# Altium PCB PCB1.PcbDoc (part 1 of 2)
Units mm, origin at the board's own origin, x right, y up, seen from the top; angles counter-clockwise.
Board outline 75.27 x 55.69 mm, 4 copper layers (Top Layer, Layer 1, Layer 2, Bottom Layer), stack 0.365 mm thick; 201 components, 124 nets, 644 pads, 413 vias.
Unrouted connection lines stored in the file: 108.
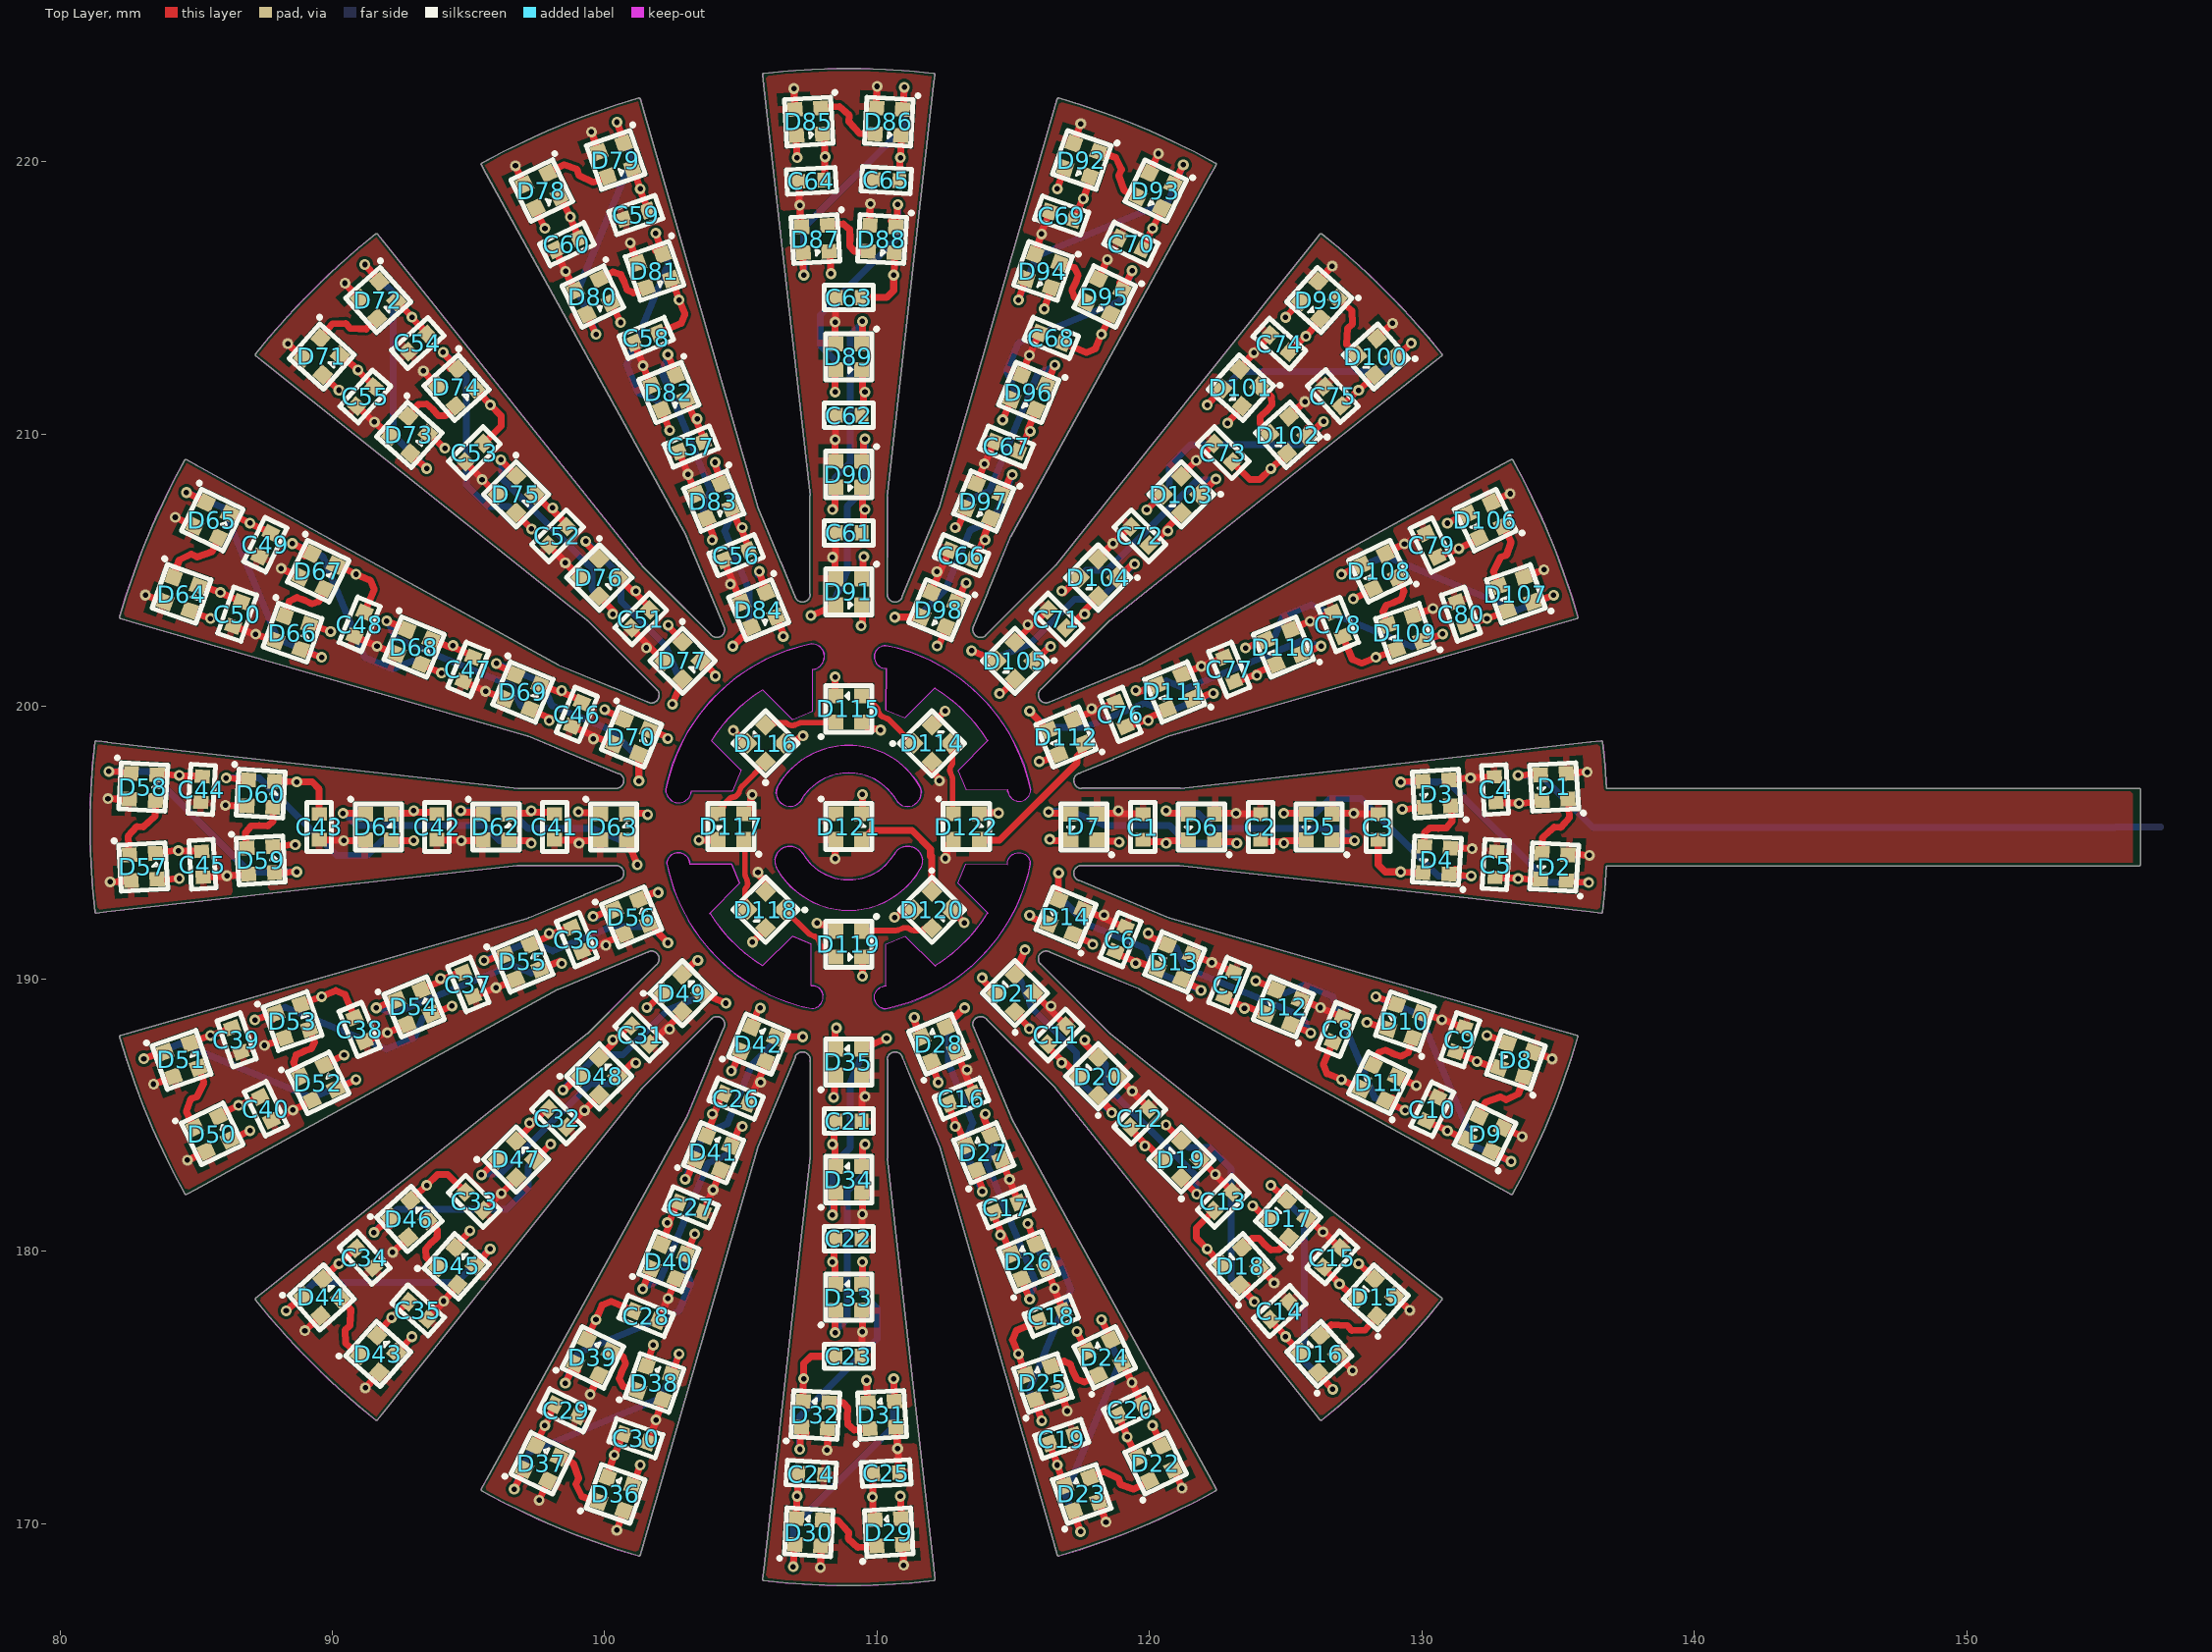
[diagram p0: Top Layer view]
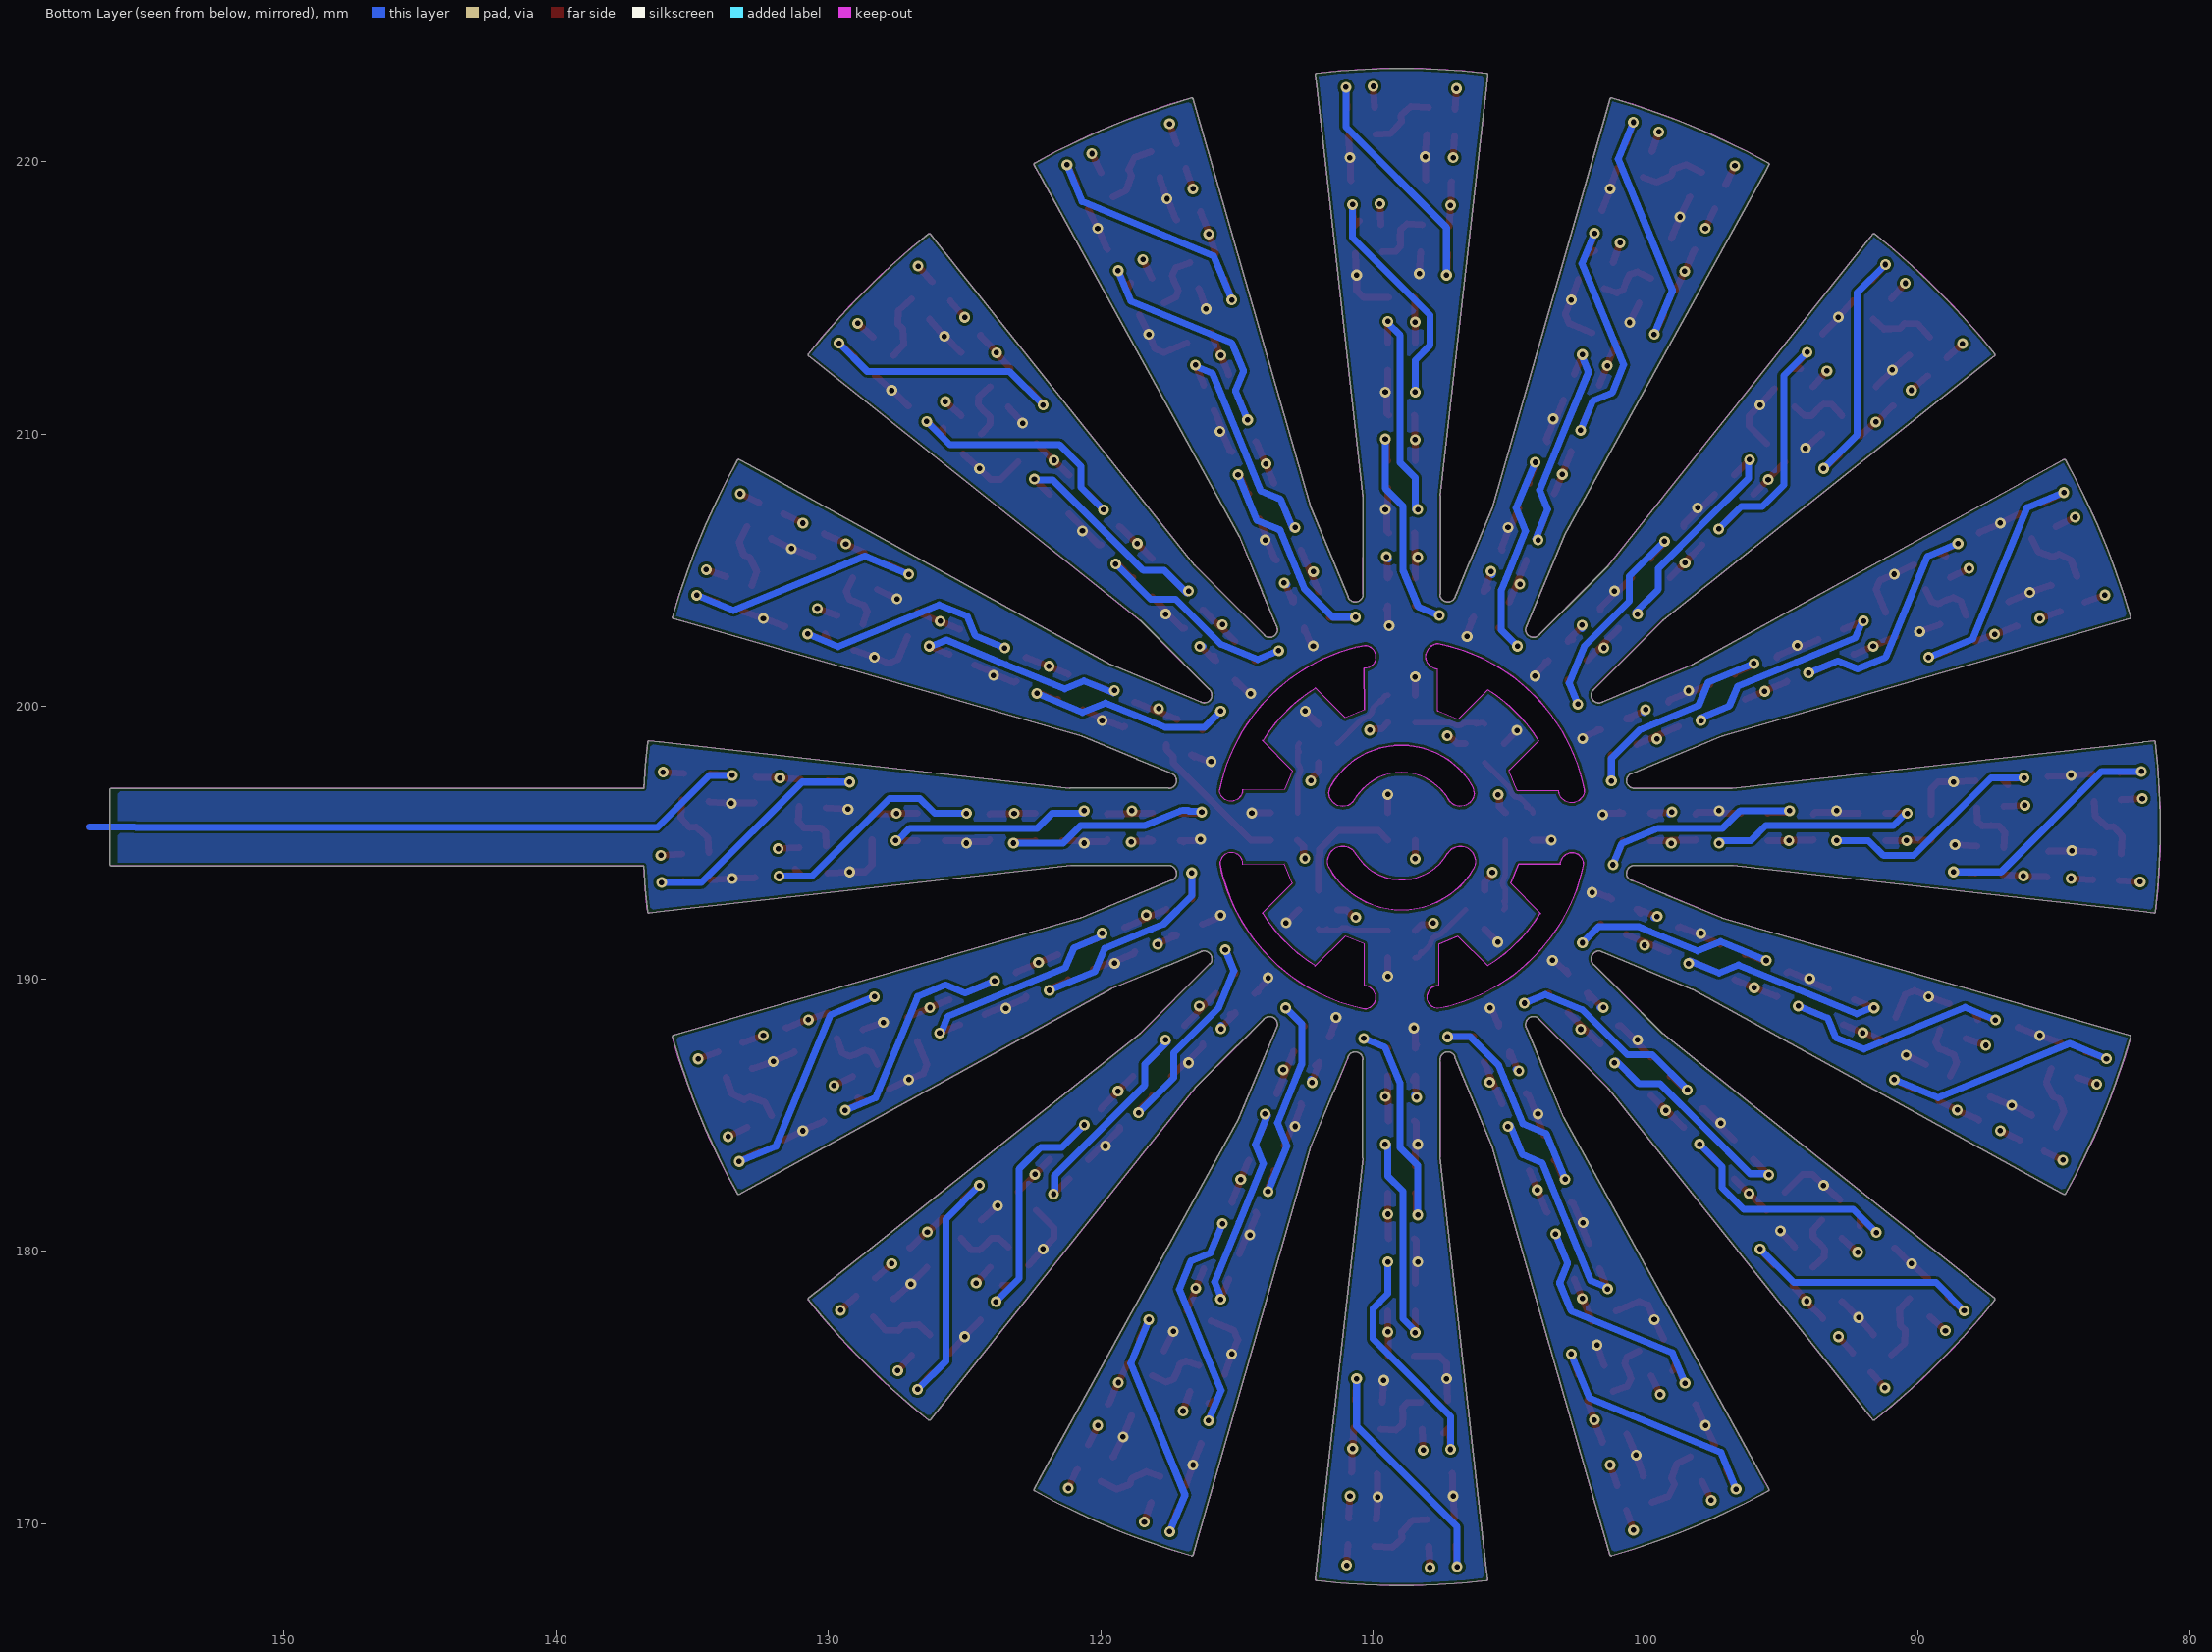
[diagram p1: Bottom Layer view, seen from below]
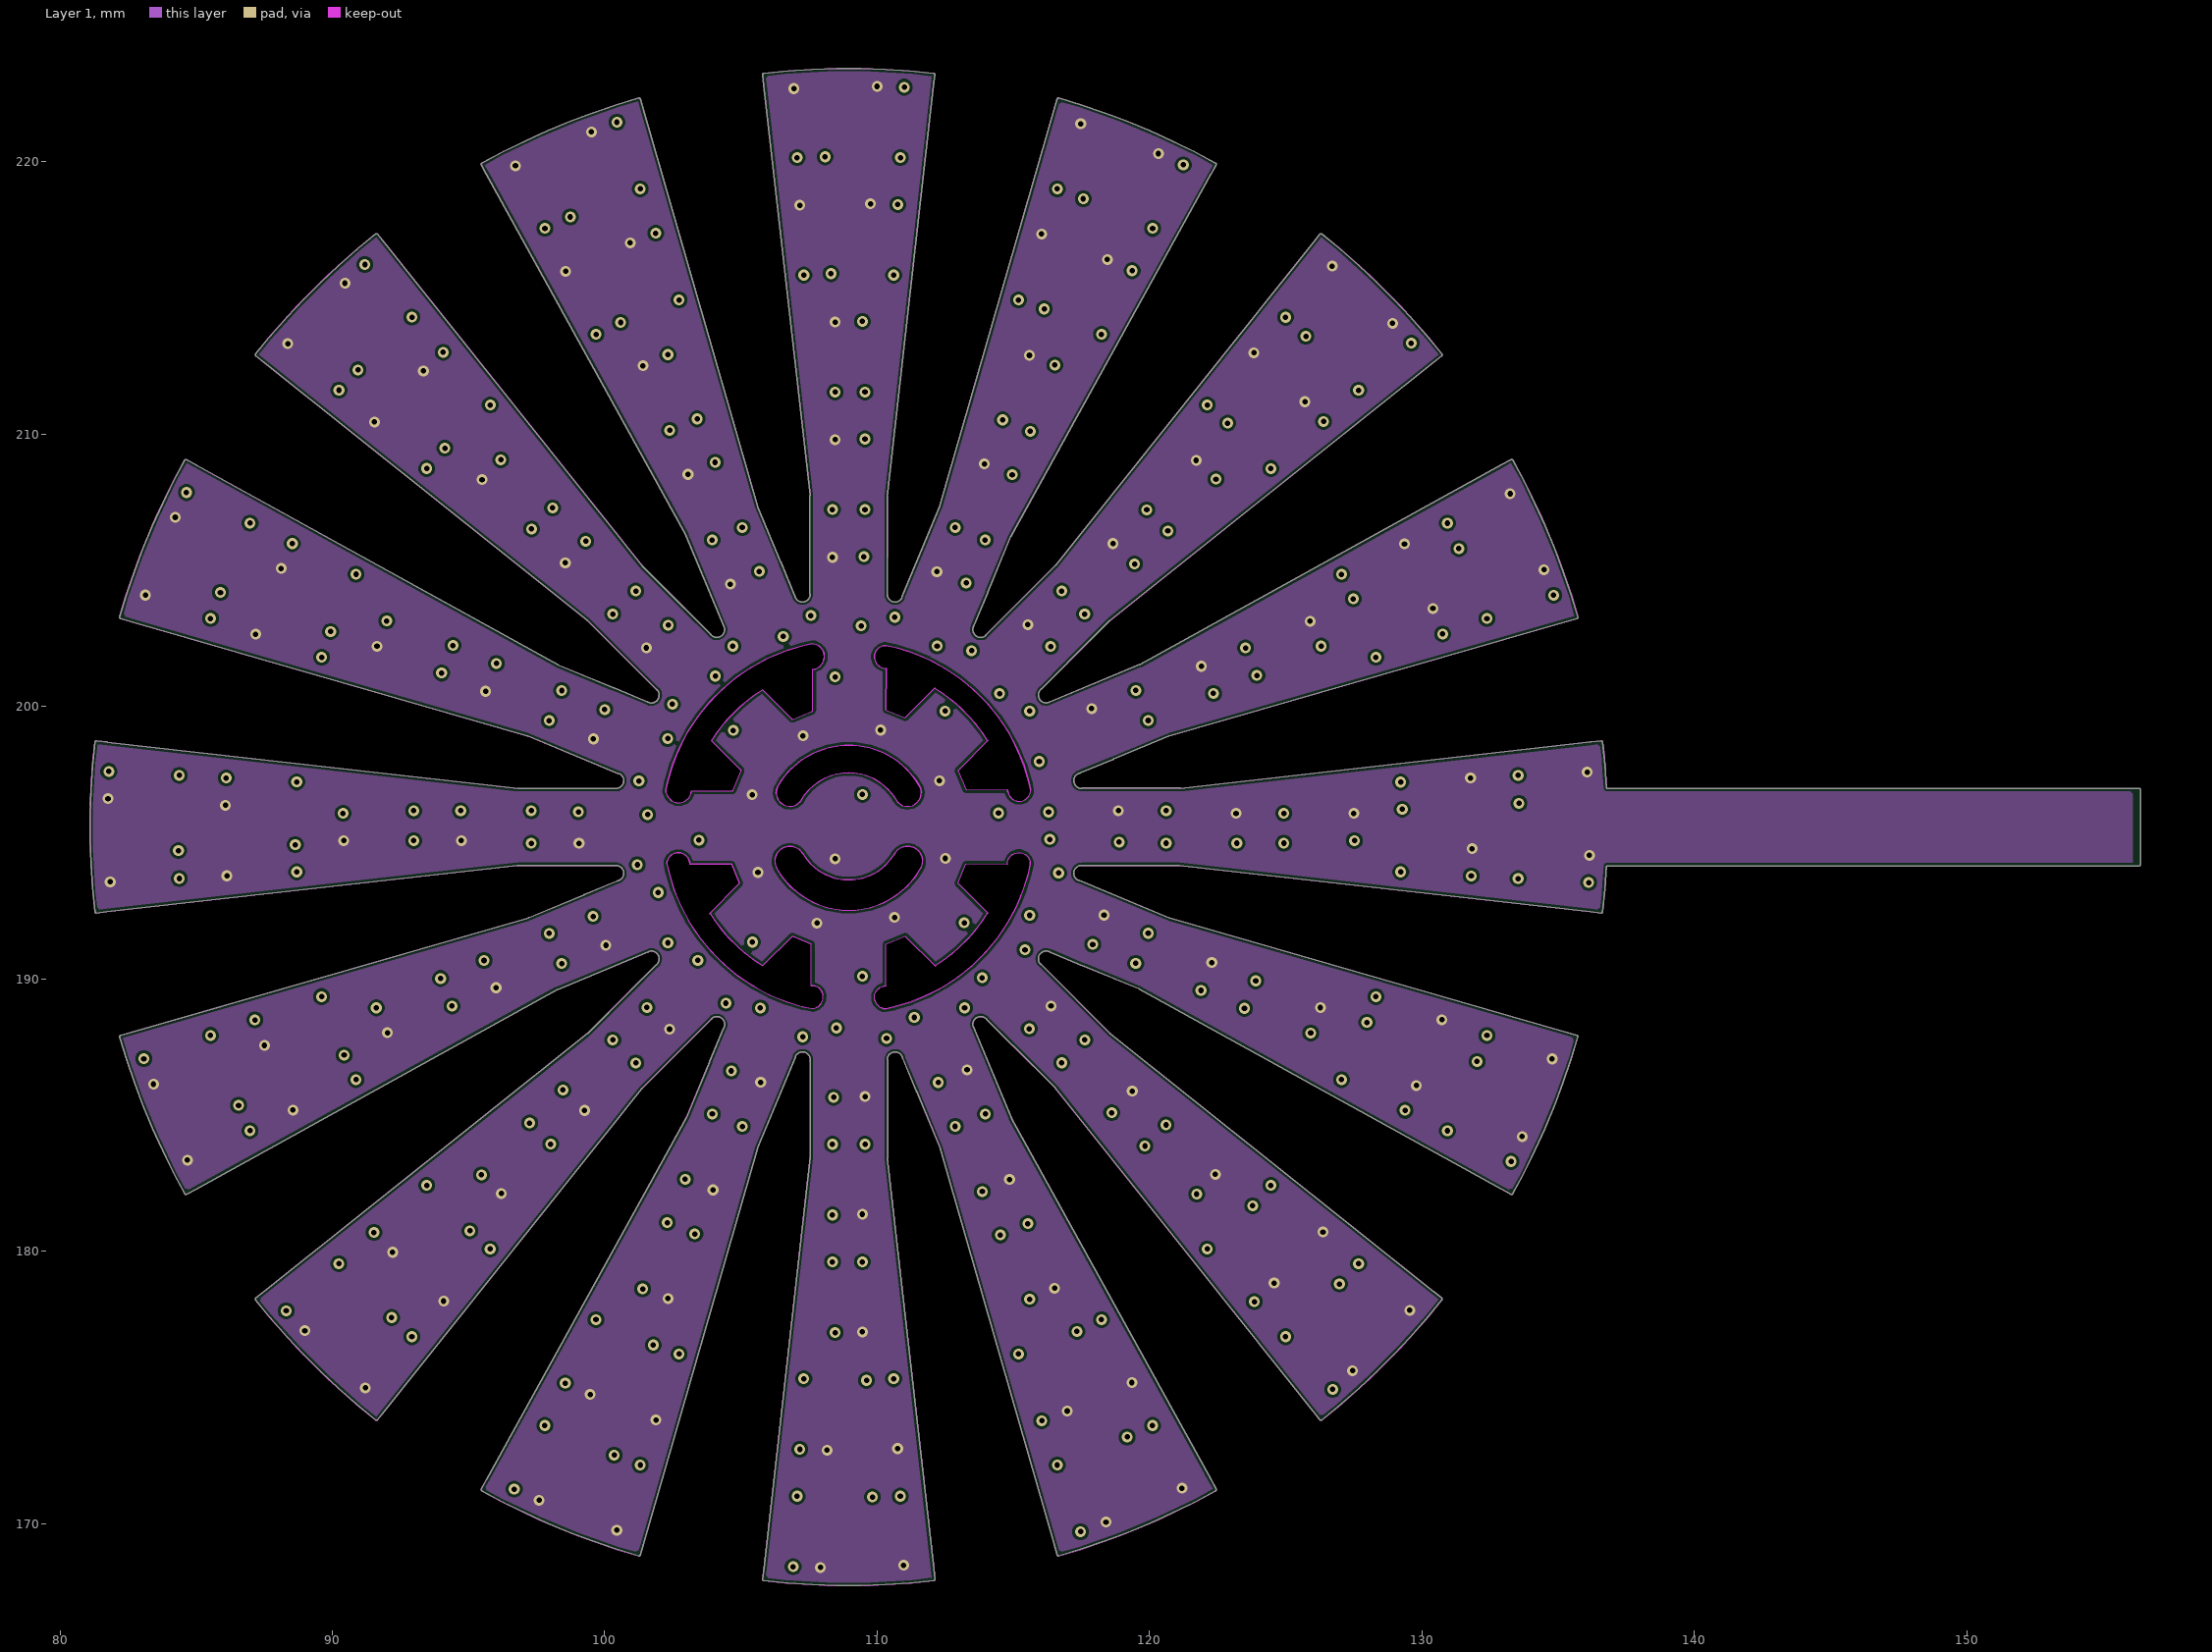
[diagram p2: Layer 1]
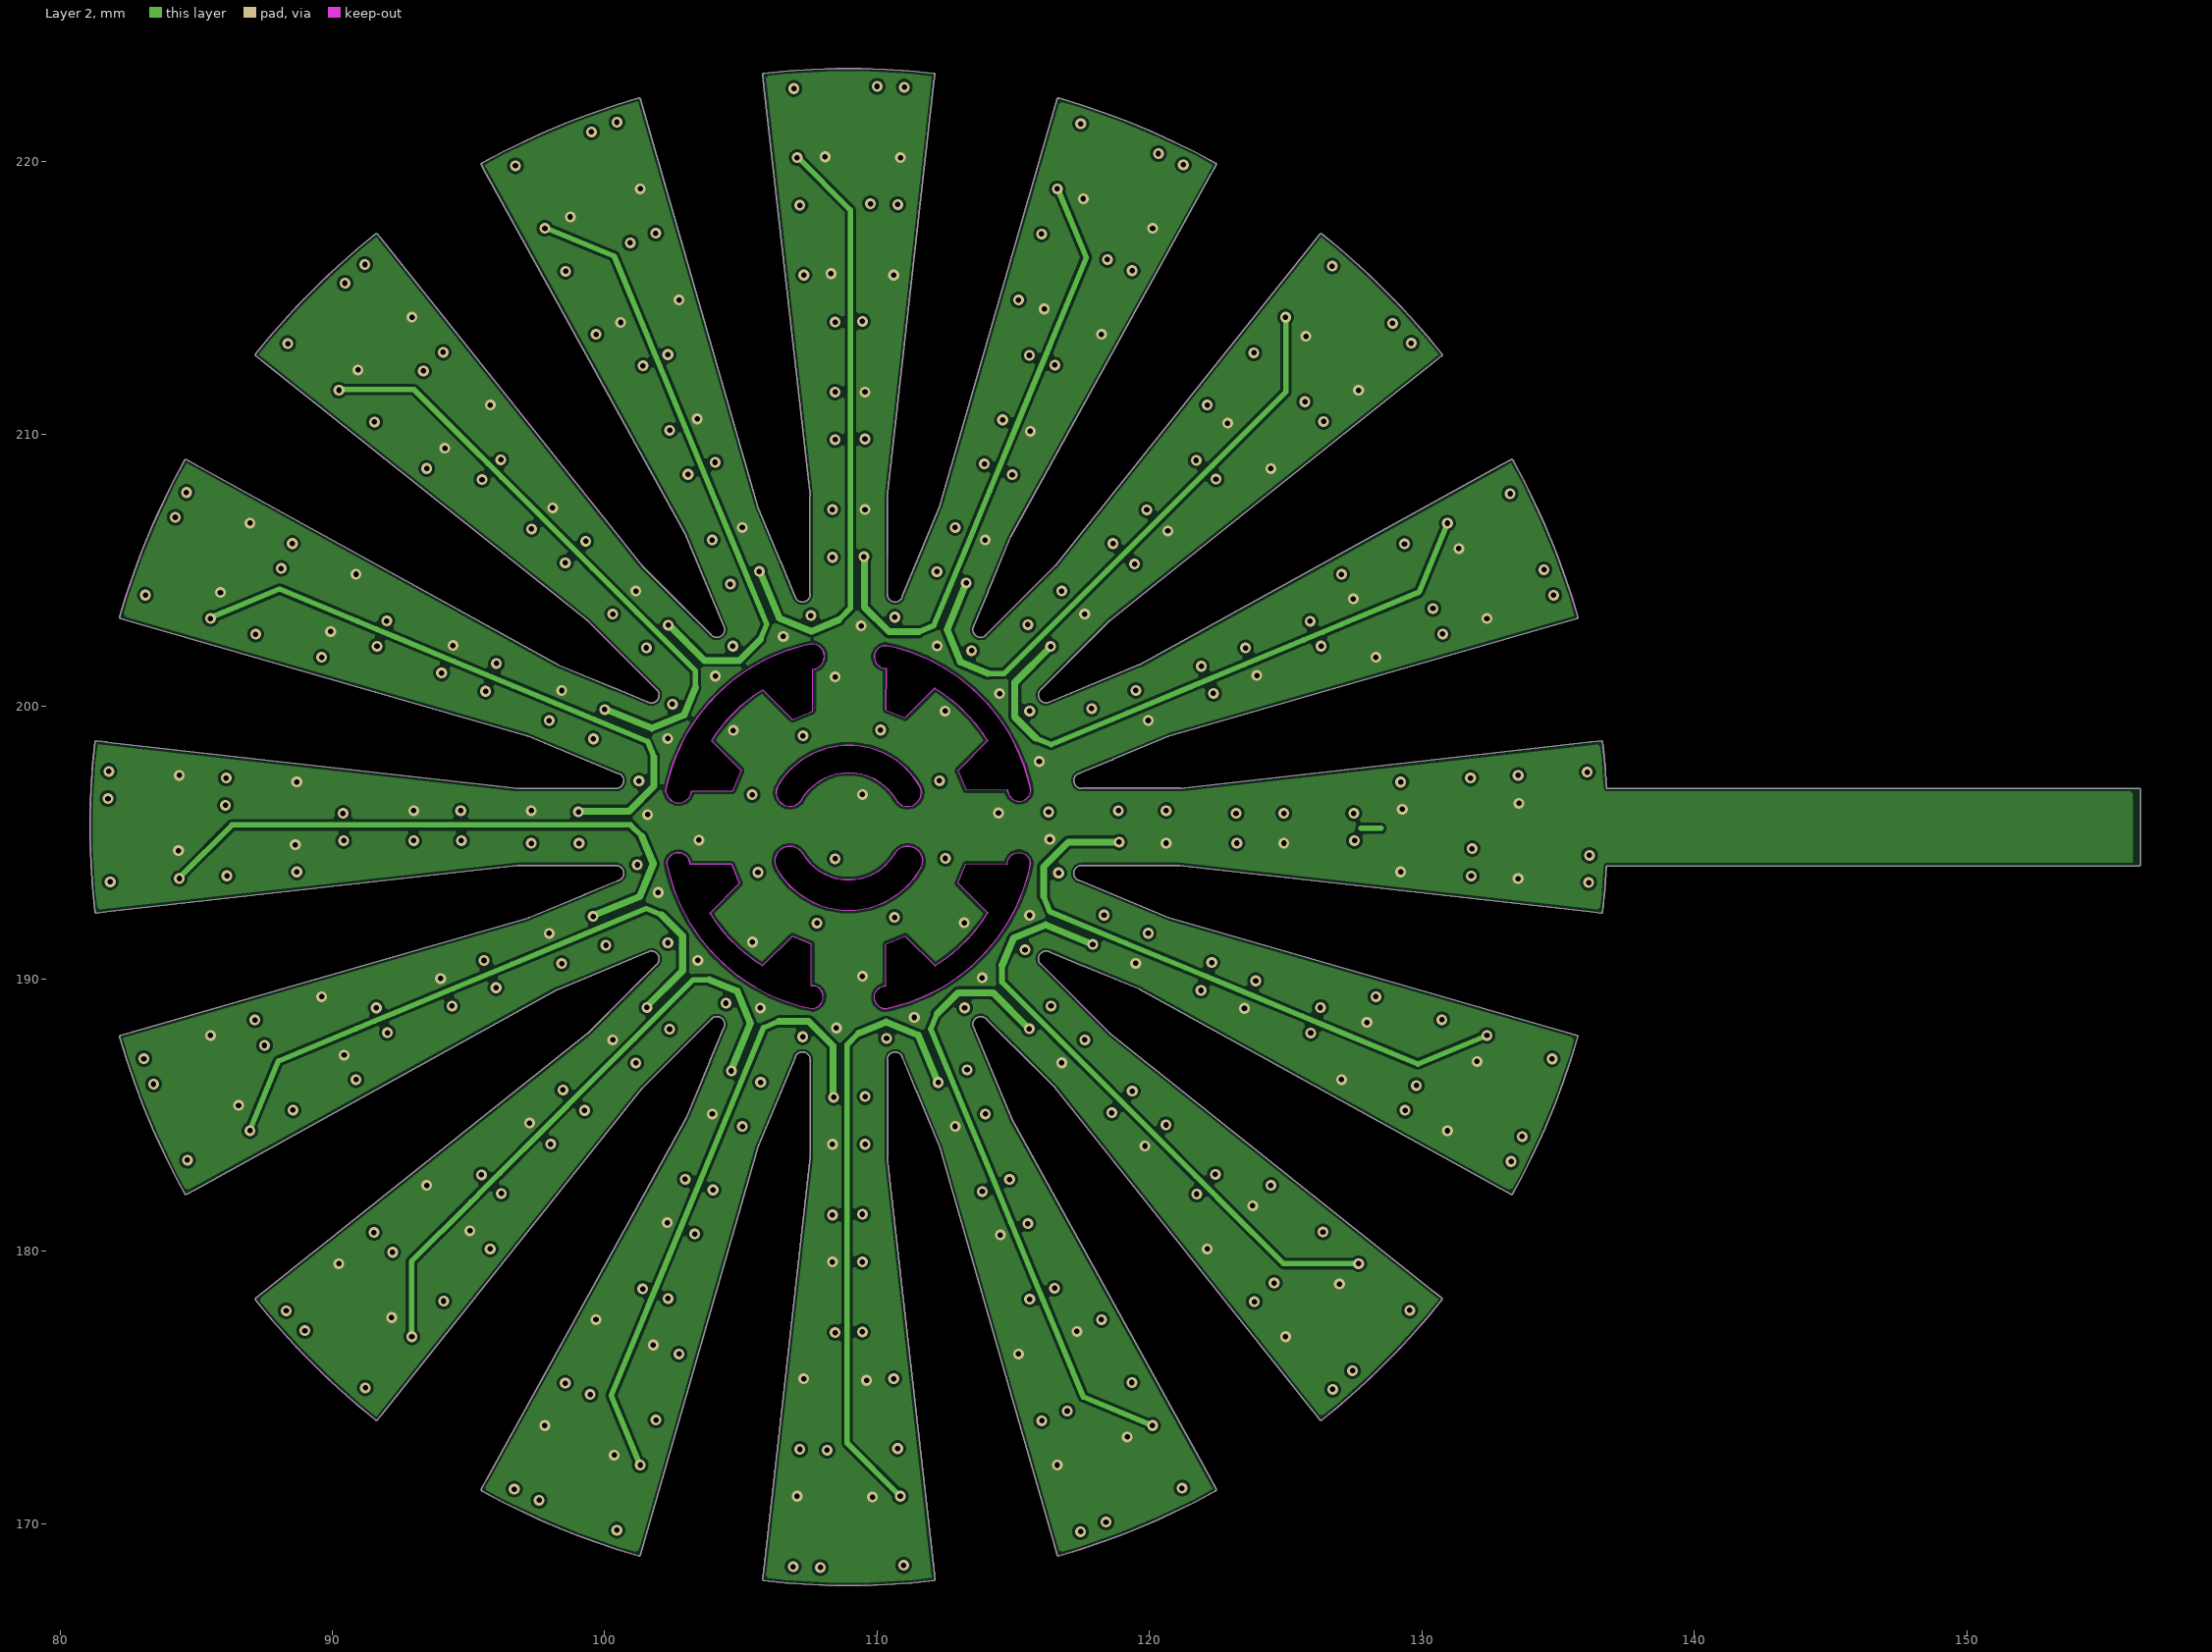
[diagram p3: Layer 2]

## Layer stack, top to bottom
Top Solder: solder mask 0.0102, Solder Resist, Dk 3.5
Top Layer: signal copper 0.0356
Dielectric 1: prepreg 0.0711, PP-006, Dk 4.1
Layer 1: signal copper 0.035
Dielectric2: dielectric 0.082, FR-4, Dk 4.8
Layer 2: signal copper 0.035
Dielectric 2: prepreg 0.0711, PP-006, Dk 4.1
Bottom Layer: signal copper 0.0356
Bottom Solder: solder mask 0.0102, Solder Resist, Dk 3.5

## Board outline
393 vertices, not listed, extent 81.109,167.733 156.375,223.427
cut-out: 110.311,188.902 cw(c110.325,189.323) 110.325,189.745 110.325,189.73 110.326,191.286 111.024,191.575 112.132,190.465 112.121,190.483 ccw(c108.957,195.58) 114.054,192.415 114.061,192.411 112.961,193.512 113.25,194.21 114.779,194.209 114.779,194.231 cw(c115.2,194.217) 115.621,194.217 cw(c108.957,195.566)
cut-out: 110.326,199.873 111.024,199.584 112.125,200.684 112.121,200.677 cw(c108.956,195.58) 114.054,198.745 114.071,198.755 112.961,197.647 113.25,196.95 114.806,196.948 114.792,196.948 ccw(c115.213,196.948) 115.634,196.934 ccw(c108.97,195.58) 110.319,202.245 ccw(c110.319,201.823) 110.305,201.402 110.327,201.402
cut-out: 110.693,196.573 ccw(c111.116,196.841) 111.522,197.132 111.547,197.093 ccw(c108.957,195.58) 106.371,197.101 ccw(c106.798,196.841) 107.234,196.597 107.221,196.575 cw(c108.956,195.58)
cut-out: 111.586,194.033 ccw(c111.115,194.319) 111.115,194.87 ccw(c111.115,194.319) 110.635,194.588 ccw(c110.646,194.582) 110.635,194.588 ccw(c110.386,194.736) 110.635,194.589 110.635,194.588 cw(c108.957,195.58) 107.264,194.613 ccw(c107.22,194.588) 107.258,194.62 ccw(c106.797,194.319) 106.797,194.87 ccw(c106.797,194.319) 106.331,194.028 ccw(c108.957,195.58)
cut-out: 102.241,196.943 ccw(c102.713,196.943) 103.183,196.9 104.663,196.899 ccw(c104.663,196.95) 104.709,196.93 104.998,197.628 ccw(c104.952,197.647) 105.002,197.647 ccw(c104.952,197.647) 104.987,197.683 103.922,198.75 cw(c108.956,195.58) 105.788,200.616 106.853,199.549 ccw(c106.889,199.584) 106.908,199.538 107.605,199.827 ccw(c107.586,199.873) 107.637,199.873 107.638,201.368 ccw(c107.588,201.837) 108.059,201.837 ccw(c107.588,201.837) 107.604,202.308 107.592,202.307 ccw(c108.956,195.594) 102.242,196.953 ccw(c102.291,196.943)
cut-out: 105.791,190.482 cw(c108.956,195.58) 103.859,192.415 103.841,192.404 104.952,193.512 104.662,194.21 103.106,194.211 103.121,194.211 ccw(c102.699,194.211) 102.278,194.226 ccw(c108.942,195.58) 107.593,188.915 ccw(c107.593,189.336) 107.607,189.757 107.585,189.757 107.586,191.286 106.889,191.575

## Design rules (kind name [scope] priority, off if disabled: settings)
Clearance [All] p1: gap=0.1 ignorepadtopadclearanceinfootprint=FALSE
PasteMaskExpansion [All] p1: expansion=-0.1
PolygonConnect [IsVia] p1: connectstyle=Direct reliefconductorwidth=0.254 reliefentries=4 polygonreliefangle="90 Angle" airgapwidth=0.254
PolygonConnect PolygonConnect_1 [All] p2: connectstyle=Relief reliefconductorwidth=0.254 reliefentries=4 polygonreliefangle="90 Angle" airgapwidth=0.254
RoutingVias [All] p1: holewidth=0.711 width=1.27 viastyle="Through Hole" minholewidth=0.1 minwidth=0.4 maxholewidth=0.711 maxwidth=1.27
SolderMaskExpansion [All] p1: expansion=0 istentingtop=FALSE
Width [All] p1: maxlimit=0.254 minlimit=0.15 preferedwidth=0.254
29 further rules are at their usual default settings.

## Components (designator, comment, footprint, x,y, rotation, side; value= is the part's Value field where it differs from the comment)
C1 "100nF" RESC1005X03N 119.756,195.579 r90 top
C2 "100nF" RESC1005X03N 124.074,195.579 r90 top
C3 "100nF" RESC1005X03N 128.392,195.579 r90 top
C4 "100nF" RESC1005X03N 132.683,196.95 r93.25 top
C5 "100nF" RESC1005X03N 132.71,194.201 r86.75 top
C6 "100nF" RESC1005X03N 118.933,191.446 r67.5 top
C7 "100nF" RESC1005X03N 122.923,189.794 r67.5 top
C8 "100nF" RESC1005X03N 126.912,188.141 r67.5 top
C9 "100nF" RESC1005X03N 131.401,187.766 r70.75 top
C10 "100nF" RESC1005X03N 130.374,185.216 r64.25 top
C11 "100nF" RESC1005X03N 116.592,187.943 r45 top
C12 "100nF" RESC1005X03N 119.645,184.89 r45 top
C13 "100nF" RESC1005X03N 122.698,181.836 r45 top
C14 "100nF" RESC1005X03N 124.778,177.808 r41.75 top
C15 "100nF" RESC1005X03N 126.703,179.772 r48.25 top
C16 "100nF" RESC1005X03N 113.088,185.602 r22.5 top
C17 "100nF" RESC1005X03N 114.741,181.613 r22.5 top
C18 "100nF" RESC1005X03N 116.393,177.623 r22.5 top
C19 "100nF" RESC1005X03N 116.772,173.107 r19.25 top
C20 "100nF" RESC1005X03N 119.302,174.184 r25.75 top
C21 "100nF" RESC1005X03N 108.955,184.78 r0 top
C22 "100nF" RESC1005X03N 108.955,180.462 r0 top
C23 "100nF" RESC1005X03N 108.955,176.144 r0 top
C24 "100nF" RESC1005X03N 107.577,171.826 r356.75 top
C25 "100nF" RESC1005X03N 110.327,171.853 r3.25 top
C26 "100nF" RESC1005X03N 104.823,185.603 r337.5 top
C27 "100nF" RESC1005X03N 103.17,181.613 r337.5 top
C28 "100nF" RESC1005X03N 101.518,177.624 r337.5 top
C29 "100nF" RESC1005X03N 98.592,174.162 r334.25 top
C30 "100nF" RESC1005X03N 101.143,173.135 r340.75 top
C31 "100nF" RESC1005X03N 101.319,187.944 r315 top
C32 "100nF" RESC1005X03N 98.266,184.891 r315 top
C33 "100nF" RESC1005X03N 95.213,181.837 r315 top
C34 "100nF" RESC1005X03N 91.185,179.758 r311.75 top
C35 "100nF" RESC1005X03N 93.148,177.833 r318.25 top
C36 "100nF" RESC1005X03N 98.979,191.448 r292.5 top
C37 "100nF" RESC1005X03N 94.989,189.795 r292.5 top
C38 "100nF" RESC1005X03N 91,188.143 r292.5 top
C39 "100nF" RESC1005X03N 86.483,187.764 r289.25 top
C40 "100nF" RESC1005X03N 87.56,185.234 r295.75 top
C41 "100nF" RESC1005X03N 98.157,195.581 r270 top
C42 "100nF" RESC1005X03N 93.839,195.581 r270 top
C43 "100nF" RESC1005X03N 89.521,195.581 r270 top
C44 "100nF" RESC1005X03N 85.203,196.959 r266.75 top
C45 "100nF" RESC1005X03N 85.229,194.209 r273.25 top
C46 "100nF" RESC1005X03N 98.979,199.713 r247.5 top
C47 "100nF" RESC1005X03N 94.99,201.366 r247.5 top
C48 "100nF" RESC1005X03N 91.001,203.018 r247.5 top
C49 "100nF" RESC1005X03N 87.538,205.944 r244.25 top
C50 "100nF" RESC1005X03N 86.511,203.393 r250.75 top
C51 "100nF" RESC1005X03N 101.32,203.217 r225 top
C52 "100nF" RESC1005X03N 98.267,206.27 r225 top
C53 "100nF" RESC1005X03N 95.214,209.323 r225 top
C54 "100nF" RESC1005X03N 93.135,213.351 r221.75 top
C55 "100nF" RESC1005X03N 91.21,211.388 r228.25 top
C56 "100nF" RESC1005X03N 104.824,205.557 r202.5 top
C57 "100nF" RESC1005X03N 103.172,209.547 r202.5 top
C58 "100nF" RESC1005X03N 101.519,213.536 r202.5 top
C59 "100nF" RESC1005X03N 101.14,218.053 r199.25 top
C60 "100nF" RESC1005X03N 98.61,216.976 r205.75 top
C61 "100nF" RESC1005X03N 108.957,206.379 r180 top
C62 "100nF" RESC1005X03N 108.957,210.697 r180 top
C63 "100nF" RESC1005X03N 108.957,215.015 r180 top
C64 "100nF" RESC1005X03N 107.586,219.306 r183.25 top
C65 "100nF" RESC1005X03N 110.335,219.333 r176.75 top
C66 "100nF" RESC1005X03N 113.09,205.557 r157.5 top
C67 "100nF" RESC1005X03N 114.742,209.546 r157.5 top
C68 "100nF" RESC1005X03N 116.395,213.535 r157.5 top
C69 "100nF" RESC1005X03N 116.77,218.025 r160.75 top
C70 "100nF" RESC1005X03N 119.32,216.998 r154.25 top
C71 "100nF" RESC1005X03N 116.593,203.215 r135 top
C72 "100nF" RESC1005X03N 119.646,206.269 r135 top
C73 "100nF" RESC1005X03N 122.7,209.322 r135 top
C74 "100nF" RESC1005X03N 124.764,213.326 r138.25 top
C75 "100nF" RESC1005X03N 126.728,211.401 r131.75 top
C76 "100nF" RESC1005X03N 118.934,199.712 r112.5 top
C77 "100nF" RESC1005X03N 122.923,201.364 r112.5 top
C78 "100nF" RESC1005X03N 126.912,203.017 r112.5 top
C79 "100nF" RESC1005X03N 130.352,205.926 r115.75 top
C80 "100nF" RESC1005X03N 131.429,203.396 r109.25 top
D1 "WS2812B-2020" CAF-100P200X220-4N 134.852,197.048 r3.25 top
D2 "WS2812B-2020" CAF-100P200X220-4N 134.852,194.11 r356.75 top
D3 "WS2812B-2020" CAF-100P200X220-4N 130.541,196.803 r3.25 top
D4 "WS2812B-2020" CAF-100P200X220-4N 130.541,194.355 r356.75 top
D5 "WS2812B-2020" CAF-100P200X220-4N 126.223,195.579 r0 top
D6 "WS2812B-2020" CAF-100P200X220-4N 121.905,195.579 r0 top
D7 "WS2812B-2020" CAF-100P200X220-4N 117.587,195.579 r0 top
D8 "WS2812B-2020" CAF-100P200X220-4N 133.443,187.026 r340.75 top
D9 "WS2812B-2020" CAF-100P200X220-4N 132.319,184.312 r334.25 top
D10 "WS2812B-2020" CAF-100P200X220-4N 129.367,188.45 r340.75 top
D11 "WS2812B-2020" CAF-100P200X220-4N 128.43,186.188 r334.25 top
D12 "WS2812B-2020" CAF-100P200X220-4N 124.909,188.971 r337.5 top
D13 "WS2812B-2020" CAF-100P200X220-4N 120.92,190.624 r337.5 top
D14 "WS2812B-2020" CAF-100P200X220-4N 116.93,192.276 r337.5 top
D15 "WS2812B-2020" CAF-100P200X220-4N 128.306,178.307 r318.25 top
D16 "WS2812B-2020" CAF-100P200X220-4N 126.229,176.229 r311.75 top
D17 "WS2812B-2020" CAF-100P200X220-4N 125.084,181.182 r318.25 top
D18 "WS2812B-2020" CAF-100P200X220-4N 123.353,179.451 r311.75 top
D19 "WS2812B-2020" CAF-100P200X220-4N 121.166,183.37 r315 top
D20 "WS2812B-2020" CAF-100P200X220-4N 118.112,186.423 r315 top
D21 "WS2812B-2020" CAF-100P200X220-4N 115.059,189.476 r315 top
D22 "WS2812B-2020" CAF-100P200X220-4N 120.223,172.217 r295.75 top
D23 "WS2812B-2020" CAF-100P200X220-4N 117.509,171.092 r289.25 top
D24 "WS2812B-2020" CAF-100P200X220-4N 118.347,176.106 r295.75 top
D25 "WS2812B-2020" CAF-100P200X220-4N 116.085,175.169 r289.25 top
D26 "WS2812B-2020" CAF-100P200X220-4N 115.564,179.627 r292.5 top
D27 "WS2812B-2020" CAF-100P200X220-4N 113.911,183.616 r292.5 top
D28 "WS2812B-2020" CAF-100P200X220-4N 112.259,187.605 r292.5 top
D29 "WS2812B-2020" CAF-100P200X220-4N 110.425,169.684 r273.25 top
D30 "WS2812B-2020" CAF-100P200X220-4N 107.487,169.684 r266.75 top
D31 "WS2812B-2020" CAF-100P200X220-4N 110.18,173.995 r273.25 top
D32 "WS2812B-2020" CAF-100P200X220-4N 107.732,173.995 r266.75 top
D33 "WS2812B-2020" CAF-100P200X220-4N 108.956,178.313 r270 top
D34 "WS2812B-2020" CAF-100P200X220-4N 108.955,182.631 r270 top
D35 "WS2812B-2020" CAF-100P200X220-4N 108.956,186.949 r270 top
D36 "WS2812B-2020" CAF-100P200X220-4N 100.403,171.093 r250.75 top
D37 "WS2812B-2020" CAF-100P200X220-4N 97.689,172.217 r244.25 top
D38 "WS2812B-2020" CAF-100P200X220-4N 101.826,175.169 r250.75 top
D39 "WS2812B-2020" CAF-100P200X220-4N 99.565,176.106 r244.25 top
D40 "WS2812B-2020" CAF-100P200X220-4N 102.348,179.627 r247.5 top
D41 "WS2812B-2020" CAF-100P200X220-4N 103.995,183.618 r247.5 top
D42 "WS2812B-2020" CAF-100P200X220-4N 105.647,187.607 r247.5 top
D43 "WS2812B-2020" CAF-100P200X220-4N 91.683,176.23 r228.25 top
D44 "WS2812B-2020" CAF-100P200X220-4N 89.606,178.307 r221.75 top
D45 "WS2812B-2020" CAF-100P200X220-4N 94.558,179.452 r228.25 top
D46 "WS2812B-2020" CAF-100P200X220-4N 92.827,181.183 r221.75 top
D47 "WS2812B-2020" CAF-100P200X220-4N 96.746,183.37 r225 top
D48 "WS2812B-2020" CAF-100P200X220-4N 99.794,186.425 r225 top
D49 "WS2812B-2020" CAF-100P200X220-4N 102.847,189.478 r225 top
D50 "WS2812B-2020" CAF-100P200X220-4N 85.593,184.313 r205.75 top
D51 "WS2812B-2020" CAF-100P200X220-4N 84.469,187.027 r199.25 top
D52 "WS2812B-2020" CAF-100P200X220-4N 89.482,186.189 r205.75 top
D53 "WS2812B-2020" CAF-100P200X220-4N 88.545,188.451 r199.25 top
D54 "WS2812B-2020" CAF-100P200X220-4N 93.003,188.972 r202.5 top
D55 "WS2812B-2020" CAF-100P200X220-4N 96.993,190.625 r202.5 top
D56 "WS2812B-2020" CAF-100P200X220-4N 100.982,192.277 r202.5 top
D57 "WS2812B-2020" CAF-100P200X220-4N 83.06,194.111 r183.25 top
D58 "WS2812B-2020" CAF-100P200X220-4N 83.06,197.049 r176.75 top
D59 "WS2812B-2020" CAF-100P200X220-4N 87.371,194.356 r183.25 top
D60 "WS2812B-2020" CAF-100P200X220-4N 87.371,196.804 r176.75 top
D61 "WS2812B-2020" CAF-100P200X220-4N 91.689,195.58 r180 top
D62 "WS2812B-2020" CAF-100P200X220-4N 96.007,195.58 r180 top
D63 "WS2812B-2020" CAF-100P200X220-4N 100.325,195.58 r180 top
D64 "WS2812B-2020" CAF-100P200X220-4N 84.469,204.133 r160.75 top
D65 "WS2812B-2020" CAF-100P200X220-4N 85.593,206.847 r154.25 top
D66 "WS2812B-2020" CAF-100P200X220-4N 88.546,202.71 r160.75 top
D67 "WS2812B-2020" CAF-100P200X220-4N 89.483,204.971 r154.25 top
D68 "WS2812B-2020" CAF-100P200X220-4N 93.004,202.188 r157.5 top
D69 "WS2812B-2020" CAF-100P200X220-4N 96.993,200.536 r157.5 top
D70 "WS2812B-2020" CAF-100P200X220-4N 100.982,198.883 r157.5 top
D71 "WS2812B-2020" CAF-100P200X220-4N 89.607,212.853 r138.25 top
D72 "WS2812B-2020" CAF-100P200X220-4N 91.684,214.93 r131.75 top
D73 "WS2812B-2020" CAF-100P200X220-4N 92.828,209.978 r138.25 top
D74 "WS2812B-2020" CAF-100P200X220-4N 94.559,211.709 r131.75 top
D75 "WS2812B-2020" CAF-100P200X220-4N 96.747,207.79 r135 top
D76 "WS2812B-2020" CAF-100P200X220-4N 99.8,204.737 r135 top
D77 "WS2812B-2020" CAF-100P200X220-4N 102.853,201.683 r135 top
D78 "WS2812B-2020" CAF-100P200X220-4N 97.69,218.943 r115.75 top
D79 "WS2812B-2020" CAF-100P200X220-4N 100.404,220.067 r109.25 top
D80 "WS2812B-2020" CAF-100P200X220-4N 99.566,215.054 r115.75 top
D81 "WS2812B-2020" CAF-100P200X220-4N 101.827,215.99 r109.25 top
D82 "WS2812B-2020" CAF-100P200X220-4N 102.349,211.533 r112.5 top
D83 "WS2812B-2020" CAF-100P200X220-4N 104.001,207.543 r112.5 top
D84 "WS2812B-2020" CAF-100P200X220-4N 105.654,203.554 r112.5 top
D85 "WS2812B-2020" CAF-100P200X220-4N 107.488,221.476 r93.25 top
D86 "WS2812B-2020" CAF-100P200X220-4N 110.425,221.476 r86.75 top
D87 "WS2812B-2020" CAF-100P200X220-4N 107.733,217.165 r93.25 top
D88 "WS2812B-2020" CAF-100P200X220-4N 110.181,217.165 r86.75 top
D89 "WS2812B-2020" CAF-100P200X220-4N 108.957,212.847 r90 top
D90 "WS2812B-2020" CAF-100P200X220-4N 108.957,208.529 r90 top
D91 "WS2812B-2020" CAF-100P200X220-4N 108.957,204.211 r90 top
D92 "WS2812B-2020" CAF-100P200X220-4N 117.51,220.067 r70.75 top
D93 "WS2812B-2020" CAF-100P200X220-4N 120.224,218.943 r64.25 top
D94 "WS2812B-2020" CAF-100P200X220-4N 116.086,215.99 r70.75 top
D95 "WS2812B-2020" CAF-100P200X220-4N 118.348,215.053 r64.25 top
D96 "WS2812B-2020" CAF-100P200X220-4N 115.565,211.532 r67.5 top
D97 "WS2812B-2020" CAF-100P200X220-4N 113.912,207.543 r67.5 top
D98 "WS2812B-2020" CAF-100P200X220-4N 112.26,203.554 r67.5 top
D99 "WS2812B-2020" CAF-100P200X220-4N 126.229,214.929 r48.25 top
D100 "WS2812B-2020" CAF-100P200X220-4N 128.307,212.852 r41.75 top
D101 "WS2812B-2020" CAF-100P200X220-4N 123.354,211.708 r48.25 top
D102 "WS2812B-2020" CAF-100P200X220-4N 125.085,209.977 r41.75 top
D103 "WS2812B-2020" CAF-100P200X220-4N 121.166,207.789 r45 top
D104 "WS2812B-2020" CAF-100P200X220-4N 118.113,204.736 r45 top
D105 "WS2812B-2020" CAF-100P200X220-4N 115.06,201.683 r45 top
D106 "WS2812B-2020" CAF-100P200X220-4N 132.319,206.846 r25.75 top
D107 "WS2812B-2020" CAF-100P200X220-4N 133.443,204.132 r19.25 top
D108 "WS2812B-2020" CAF-100P200X220-4N 128.43,204.97 r25.75 top
D109 "WS2812B-2020" CAF-100P200X220-4N 129.367,202.709 r19.25 top
D110 "WS2812B-2020" CAF-100P200X220-4N 124.909,202.187 r22.5 top
D111 "WS2812B-2020" CAF-100P200X220-4N 120.92,200.535 r22.5 top
D112 "WS2812B-2020" CAF-100P200X220-4N 116.931,198.882 r22.5 top
D114 "WS2812B-2020" CAF-100P200X220-4N 112.01,198.647 r225 top
D115 "WS2812B-2020" CAF-100P200X220-4N 108.956,199.912 r270 top
D116 "WS2812B-2020" CAF-100P200X220-4N 105.903,198.647 r315 top
D117 "WS2812B-2020" CAF-100P200X220-4N 104.638,195.594 r0 top
D118 "WS2812B-2020" CAF-100P200X220-4N 105.903,192.541 r45 top
D119 "WS2812B-2020" CAF-100P200X220-4N 108.956,191.276 r90 top
D120 "WS2812B-2020" CAF-100P200X220-4N 112.01,192.541 r135 top
D121 "WS2812B-2020" CAF-100P200X220-4N 108.956,195.594 r180 top
D122 "WS2812B-2020" CAF-100P200X220-4N 113.274,195.594 r180 top (schematic designator D117)

## Footprints (in the part's own frame and the unit in brackets; to place one, negate y for a bottom-side part, rotate by r counter-clockwise, add the part's x,y. Pads: shape width x height; smd on the part's side, far side on the other; paste and mask are expansions set on the pad)
CAF-100P200X220-4N [mm] "Chip Array, Flat, 4-Leads, Pitch 1.00mm,  Body 2.00x2.20mm,  IPC Medium Density"
  rect 0.55x0.55 smd mask+0: 1(0.475,-0.475) 2(0.475,0.475) 3(-0.475,0.475) 4(-0.475,-0.475)
  silkscreen extent -0.85,-1.02 1.02,0.85, body extent -0.75,-0.75 0.75,0.75, height 0.65
RESC1005X03N [mm] "Chip Resistor, 2-Leads, Body 1.00x0.50mm, IPC Medium Density"
  rect 0.5x0.55 smd: 1(-0.475,0) 2(0.475,0)
  silkscreen extent -0.9,-0.45 0.9,0.45, body extent -0.5,-0.25 0.5,0.25, height 0.3

## Part data
C1 C2 C3 C4 C5 C6 C7 C8 C9 C10 C11 C12 C13 C14 C15 C16 C17 C18 C19 C20 C21 C22 C23 C24 C25 C26 C27 C28 C29 C30 C31 C32 C33 C34 C35 C36 C37 C38 C39 C40 C41 C42 C43 C44 C45 C46 C47 C48 C49 C50 C51 C52 C53 C54 C55 C56 C57 C58 C59 C60 C61 C62 C63 C64 C65 C66 C67 C68 C69 C70 C71 C72 C73 C74 C75 C76 C77 C78 C79 C80: library part CAP

## Via types
v1: diameter 0.4, hole 0.2, Top Layer to Bottom Layer, tented both sides, 413 vias

## Nets (pads, with @x,y where several pads share a name; then routed paths per layer and width w, separated by ;. In a path a pad name is that pad's centre, name@x,y a point inside that pad or via, vN(x,y) a via of type N, cw(c..) or ccw(c..) an arc to the next point about the centre after c; other vN are vias at no path point)
GND: C1.2 C2.2 C3.2 C4.2 C5.2 C6.2 C7.2 C8.2 C9.2 C10.2 C11.2 C12.2 C13.2 C14.2 C15.2 C16.2 C17.2 C18.2 C19.2 C20.2 C21.2 C22.2 C23.2 C24.2 C25.2 C26.2 C27.2 C28.2 C29.2 C30.2 C31.2 C32.2 C33.2 C34.2 C35.2 C36.2 C37.2 C38.2 C39.2 C40.2 C41.2 C42.2 C43.2 C44.2 C45.2 C46.2 C47.2 C48.2 C49.2 C50.2 C51.2 C52.2 C53.2 C54.2 C55.2 C56.2 C57.2 C58.2 C59.2 C60.2 C61.2 C62.2 C63.2 C64.2 C65.2 C66.2 C67.2 C68.2 C69.2 C70.2 C71.2 C72.2 C73.2 C74.2 C75.2 C76.2 C77.2 C78.2 C79.2 C80.2 D1.2 D2.2 D3.2 D4.2 D5.2 D6.2 D7.2 D8.2 D9.2 D10.2 D11.2 D12.2 D13.2 D14.2 D15.2 D16.2 D17.2 D18.2 D19.2 D20.2 D21.2 D22.2 D23.2 D24.2 D25.2 D26.2 D27.2 D28.2 D29.2 D30.2 D31.2 D32.2 D33.2 D34.2 D35.2 D36.2 D37.2 D38.2 D39.2 D40.2 D41.2 D42.2 D43.2 D44.2 D45.2 D46.2 D47.2 D48.2 D49.2 D50.2 D51.2 D52.2 D53.2 D54.2 D55.2 D56.2 D57.2 D58.2 D59.2 D60.2 D61.2 D62.2 D63.2 D64.2 D65.2 D66.2 D67.2 D68.2 D69.2 D70.2 D71.2 D72.2 D73.2 D74.2 D75.2 D76.2 D77.2 D78.2 D79.2 D80.2 D81.2 D82.2 D83.2 D84.2 D85.2 D86.2 D87.2 D88.2 D89.2 D90.2 D91.2 D92.2 D93.2 D94.2 D95.2 D96.2 D97.2 D98.2 D99.2 D100.2 D101.2 D102.2 D103.2 D104.2 D105.2 D106.2 D107.2 D108.2 D109.2 D110.2 D111.2 D112.2 D114.2 D115.2 D116.2 D117.2 D118.2 D119.2 D120.2 D121.2 D122.2 | length 152.9
  Top Layer w0.254: v1(81.764,196.622) D58.2@82.533,196.579 ; v1(81.846,193.566) D57.2@82.614,193.609 ; v1(83.139,204.094) D64.2@83.866,203.84 ; v1(83.435,186.137) D51.2@84.162,186.391 ; v1(84.233,206.949) D65.2@84.926,206.614 ; v1(84.68,183.344) D50.2@85.374,183.679 ; C45.2@85.256,193.735 85.282,193.761 86.108,193.761 v1(86.132,193.785) D59.2@86.9,193.829 ; v1(86.075,196.377) D60.2@86.844,196.334 ; C50.2@86.355,202.945 86.388,202.959 87.151,202.643 v1(87.183,202.657) D66.2@87.909,202.403 ; v1(87.512,187.56) D53.2@88.238,187.814 ; C40.2@87.766,184.806 87.78,184.84 88.543,185.156 v1(88.556,185.188) D52.2@89.249,185.522 ; v1(88.122,205.073) D67.2@88.815,204.738 ; v1(88.362,213.326) D71.2@88.936,212.815 ; v1(88.991,177.089) D44.2@89.566,177.602 ; C43.2@89.521,195.106 89.533,195.093 90.407,195.093 v1(90.419,195.081) D61.2@91.189,195.081 ; v1(90.466,215.545) D72.2@90.978,214.97 ; C48.2@90.819,202.579 90.826,202.563 91.633,202.229 v1(91.639,202.212) D68.2@92.351,201.918 ; C55.2@90.894,211.034 90.93,211.034 91.514,210.45 v1(91.548,210.45) D73.2@92.122,209.938 ; C38.2@91.182,187.704 91.198,187.697 92.005,188.032 v1(92.022,188.025) D54.2@92.733,188.319 ; v1(91.21,174.986) D43.2@91.721,175.559 ; v1(92.213,179.964) D46.2@92.787,180.477 ; v1(93.341,212.323) D74.2@93.853,211.749 ; C35.2@93.502,177.517 93.502,177.554 94.086,178.137 v1(94.086,178.172) D45.2@94.598,178.746 ; C42.2@93.839,195.106 93.851,195.093 94.725,195.093 v1(94.737,195.081) D62.2@95.507,195.081 ; C47.2@94.808,200.927 94.815,200.911 95.622,200.576 v1(95.629,200.56) D69.2@96.34,200.265 ; C53.2@94.878,208.987 94.878,208.97 95.496,208.352 v1(95.496,208.334) D75.2@96.04,207.79 ; C37.2@95.171,189.357 95.187,189.35 95.994,189.684 v1(96.011,189.677) D55.2@96.722,189.972 ; C33.2@95.549,181.502 95.566,181.502 96.184,182.119 v1(96.202,182.119) D47.2@96.746,182.664 ; v1(96.721,219.856) D78.2@97.055,219.162 ; v1(97.587,170.856) D37.2@97.922,171.55 ; C52.2@97.931,205.934 97.931,205.916 98.549,205.299 v1(98.549,205.281) D76.2@99.093,204.737 ; C41.2@98.157,195.106 98.169,195.093 99.043,195.093 v1@99.055,195.081 ; C60.2@98.183,216.769 98.216,216.756 98.532,215.993 v1(98.564,215.98) D80.2@98.898,215.287 ; C32.2@98.602,184.555 98.62,184.555 99.237,185.173 v1(99.255,185.173) D48.2@99.799,185.717 ; C46.2@98.797,199.274 98.804,199.258 99.611,198.924 v1@99.618,198.907 ; v1(99.055,194.979) 99.076,195.03 v1@99.055,195.081 ; C36.2@99.16,191.009 99.177,191.002 99.984,191.337 v1@100,191.33 ; v1(99.463,174.746) D39.2@99.798,175.439 ; v1(99.513,221.101) D79.2@99.767,220.374 ; v1(99.579,198.814) 99.618,198.853 v1@99.618,198.907 ; D63.2@99.825,195.081 v1@99.055,195.081 ; v1(100.039,191.236) 100.039,191.291 v1@100,191.33 ; D70.2@100.329,198.613 v1@99.618,198.907 ; v1(100.442,169.762) D36.2@100.696,170.489 ; D56.2@100.711,191.624 v1@100,191.33 ; v1(100.937,217.024) D81.2@101.191,216.298 ; C51.2@100.985,202.881 100.985,202.863 101.602,202.245 v1@101.602,202.228 ; C58.2@101.081,213.354 101.074,213.338 101.408,212.531 v1(101.401,212.514) D82.2@101.696,211.803 ; v1(101.531,202.156) 101.581,202.177 v1@101.602,202.228 ; C30.2@101.591,172.978 101.577,173.012 101.893,173.774 v1(101.879,173.806) D38.2@102.133,174.533 ; C31.2@101.655,187.608 101.673,187.608 102.291,188.226 v1@102.308,188.226 ; C28.2@101.957,177.442 101.973,177.449 102.307,178.256 v1(102.324,178.263) D40.2@102.618,178.974 ; D77.2@102.147,201.683 v1@101.602,202.228 ; v1(102.38,188.154) 102.359,188.205 v1@102.308,188.226 ; C57.2@102.733,209.365 102.726,209.349 103.061,208.541 v1(103.054,208.525) D83.2@103.348,207.814 ; D49.2@102.853,188.77 v1@102.308,188.226 ; C27.2@103.609,181.432 103.625,181.438 103.96,182.246 v1(103.976,182.252) D41.2@104.271,182.964 ; C56.2@104.385,205.376 104.379,205.359 104.713,204.552 v1@104.706,204.536 ; v1(104.613,204.497) 104.667,204.497 v1@104.706,204.536 ; D84.2@105.001,203.825 v1@104.706,204.536 ; D117.2@105.138,196.094 105.361,196.317 105.361,196.672 105.411,196.723 v1(105.411,196.762) ; C26.2@105.262,185.421 105.278,185.428 105.612,186.235 v1@105.629,186.242 ; v1(105.624,193.913) 105.652,193.885 105.652,193.815 105.903,193.563 D118.2@105.903,193.248 ; v1(105.722,186.203) 105.683,186.242 v1@105.629,186.242 ; D42.2@105.923,186.953 v1@105.629,186.242 ; D116.2@106.61,198.647 106.925,198.647 107.177,198.899 107.248,198.899 v1(107.276,198.927) ; v1(106.942,222.69) D85.2@106.986,221.921 ; C64.2@107.112,219.279 107.138,219.254 107.138,218.428 v1(107.162,218.404) D87.2@107.205,217.636 ; v1(107.788,192.049) 107.828,192.049 107.878,191.999 108.233,191.999 D119.2@108.456,191.776 ; v1(107.914,168.388) D30.2@107.957,169.156 ; v1(108.159,172.699) D32.2@108.202,173.467 ; v1(108.356,205.481) 108.406,205.46 v1@108.457,205.481 ; v1@108.44,194.414 v1(108.456,194.414) D121.2@108.456,195.094 ; D91.2@108.457,204.711 v1@108.457,205.481 ; D90.2@108.457,209.029 v1(108.457,209.799) 108.47,209.811 108.47,210.685 C62.2@108.482,210.697 ; D89.2@108.457,213.347 v1(108.457,214.117) 108.47,214.129 108.47,215.003 C63.2@108.482,215.015 ; C61.2@108.482,206.379 108.47,206.367 108.47,205.493 v1@108.457,205.481 ; C23.2@109.43,176.144 109.443,176.157 109.443,177.031 v1(109.455,177.043) D33.2@109.455,177.813 ; C22.2@109.43,180.462 109.443,180.475 109.443,181.349 v1(109.455,181.361) D34.2@109.455,182.131 ; C21.2@109.43,184.78 109.443,184.793 109.443,185.667 v1@109.455,185.679 ; D35.2@109.455,186.449 v1@109.455,185.679 ; D115.2@109.456,199.412 109.679,199.189 110.035,199.189 110.085,199.139 v1(110.124,199.139) ; v1(109.557,185.679) 109.506,185.7 v1@109.455,185.679 ; D88.2@109.71,217.692 v1(109.754,218.461) ; D86.2@109.955,222.003 v1(109.999,222.772) ; v1(110.637,192.261) 110.665,192.289 110.736,192.289 110.987,192.541 D120.2@111.302,192.541 ; D31.2@110.707,173.524 v1(110.751,172.755) 110.775,172.731 110.775,171.906 C25.2@110.801,171.88 ; D29.2@110.927,169.238 v1(110.97,168.469) ; D98.2@111.989,204.207 v1@112.284,204.918 ; D114.2@112.01,197.94 112.01,197.625 112.261,197.373 112.261,197.303 v1(112.289,197.275) ; v1(112.19,204.957) 112.229,204.918 v1@112.284,204.918 ; v1(112.501,194.426) 112.501,194.465 112.551,194.515 112.551,194.871 D122.2@112.774,195.094 ; C66.2@112.651,205.739 112.635,205.732 112.3,204.925 v1@112.284,204.918 ; D28.2@112.912,187.335 v1@113.206,186.624 ; v1(113.3,186.662) 113.245,186.662 v1@113.206,186.624 ; C16.2@113.527,185.784 113.534,185.8 113.199,186.607 v1@113.206,186.624 ; D97.2@113.642,208.196 v1(113.936,208.907) 113.953,208.914 114.287,209.721 C67.2@114.303,209.728 ; D27.2@114.564,183.346 v1(114.859,182.634) 114.852,182.618 115.186,181.811 C17.2@115.179,181.795 ; D105.2@115.06,202.389 v1@115.604,202.934 ; D96.2@115.294,212.185 v1(115.589,212.897) 115.605,212.903 115.939,213.71 C68.2@115.956,213.717 ; v1(115.533,203.005) 115.554,202.955 v1@115.604,202.934 ; D21.2@115.766,189.476 v1@116.31,188.932 ; D94.2@115.779,216.627 v1(116.033,217.353) 116.02,217.385 116.336,218.147 C69.2@116.321,218.181 ; D26.2@116.216,179.356 v1(116.511,178.645) 116.504,178.629 116.839,177.822 C18.2@116.832,177.805 ; C71.2@116.257,203.551 116.24,203.551 115.622,202.934 v1@115.604,202.934 ; v1(116.382,189.003) 116.331,188.982 v1@116.31,188.932 ; D25.2@116.722,174.862 v1(116.975,174.135) ; C11.2@116.928,188.279 116.928,188.296 116.31,188.914 v1@116.31,188.932 ; D112.2@117.201,199.535 v1@117.912,199.83 ; D92.2@117.216,220.67 v1(117.47,221.397) ; D14.2@117.583,192.547 v1@118.294,192.252 ; v1(117.874,199.923) 117.874,199.869 v1@117.912,199.83 ; D7.2@118.087,196.079 v1@118.857,196.079 ; D104.2@118.113,205.443 v1(118.657,205.987) 118.675,205.987 119.293,206.605 C72.2@119.311,206.605 ; D95.2@118.115,215.721 v1(118.449,216.414) ; D23.2@118.145,170.785 v1(118.399,170.059) ; v1(118.333,192.346) 118.294,192.307 v1@118.294,192.252 ; C76.2@118.752,200.151 118.736,200.157 117.929,199.823 v1@117.912,199.83 ; D20.2@118.819,186.423 v1(119.363,185.879) 119.363,185.861 119.981,185.243 C12.2@119.981,185.225 ; v1(118.857,196.18) 118.836,196.13 v1@118.857,196.079 ; D24.2@119.014,175.873 v1(119.348,175.179) 119.38,175.166 119.696,174.404 C20.2@119.73,174.39 ; C6.2@119.115,191.885 119.108,191.901 118.301,192.236 v1@118.294,192.252 ; C1.2@119.756,196.054 119.743,196.066 118.869,196.066 v1@118.857,196.079 ; D93.2@119.991,219.61 v1(120.325,220.303) ; D22.2@120.857,171.997 v1(121.192,171.304) ; D103.2@121.166,208.496 v1(121.711,209.04) 121.728,209.04 122.346,209.658 C73.2@122.364,209.658 ; D111.2@121.19,201.188 v1(121.902,201.482) 121.918,201.475 122.725,201.81 C77.2@122.741,201.803 ; D13.2@121.572,190.894 v1(122.284,190.6) 122.29,190.583 123.098,190.249 C7.2@123.104,190.233 ; D19.2@121.872,183.37 v1(122.417,182.825) 122.417,182.808 123.034,182.19 C13.2@123.034,182.172 ; D6.2@122.405,196.079 v1(123.175,196.079) 123.187,196.066 124.061,196.066 C2.2@124.074,196.054 ; D101.2@123.314,212.414 v1(123.827,212.988) 123.827,213.022 124.41,213.606 C74.2@124.41,213.642 ; D18.2@124.059,179.411 v1(124.572,178.836) ; D102.2@125.125,210.683 v1(125.7,211.195) ; D110.2@125.18,202.84 v1(125.891,203.135) 125.907,203.128 126.714,203.462 C78.2@126.731,203.455 ; D12.2@125.562,189.242 v1(126.273,188.947) 126.28,188.931 127.087,188.597 C8.2@127.094,188.58 ; D17.2@125.79,181.222 v1(126.364,180.709) 126.399,180.709 126.982,180.126 C15.2@127.019,180.126 ; D99.2@126.189,215.599 v1(126.702,216.174) ; D5.2@126.723,196.079 v1(127.493,196.079) 127.505,196.066 128.379,196.066 C3.2@128.392,196.054 ; D16.2@126.934,176.189 v1(127.447,175.615) ; D100.2@128.347,213.558 v1(128.921,214.07) ; D108.2@128.663,205.638 v1(129.356,205.972) 129.37,206.004 130.132,206.32 C79.2@130.146,206.353 ; D15.2@128.976,178.347 v1(129.55,177.834) ; D11.2@129.097,186.421 v1(129.79,186.087) ; D109.2@129.674,203.345 v1(130.401,203.599) ; D10.2@130.003,188.757 v1(130.73,188.503) 130.762,188.516 131.524,188.2 C9.2@131.558,188.215 ; D3.2@131.012,197.33 v1(131.781,197.374) 131.805,197.398 132.63,197.398 C4.2@132.656,197.424 ; D4.2@131.069,194.826 v1(131.837,194.782) ; D106.2@132.541,207.481 v1(133.232,207.815) ; D9.2@132.986,184.545 v1(133.68,184.211) ; D107.2@133.751,204.769 v1(134.477,205.023) ; D8.2@134.047,187.32 v1(134.774,187.066) ; D1.2@135.298,197.55 v1(136.066,197.594) ; D2.2@135.38,194.581 v1(136.148,194.537)
  other v1: 126.268,188.948 122.278,190.601 118.328,192.347
NetD1_1: D1.1 D2.3 | length 2.5
  Top Layer w0.254: D2.3@134.381,194.638 134.412,195.183 134.852,195.576 135.09,195.563 135.417,195.929 D1.1@135.38,196.577
NetD1_3: D1.3 | length 25.2
  Top Layer w0.254: v1(133.529,197.473) D1.3@134.325,197.519
  Bottom Layer w0.254: v1(133.529,197.473) 134.37,197.473 136.28,195.564 155.432,195.564 155.448,195.58 157.099,195.58
NetD2_1: D2.1 D3.3 | length 10
  Top Layer w0.254: v1(129.218,197.229) D3.3@130.014,197.274 ; D2.1@135.323,193.583 v1(136.118,193.537)
  Bottom Layer w0.254: v1(129.218,197.229) 130.966,197.229 134.657,193.537 v1(136.118,193.537)
NetD3_1: D3.1 D4.3 | length 2.2
  Top Layer w0.254: D4.3@130.07,194.882 130.098,195.375 130.295,195.551 130.595,195.534 130.896,195.551 131.1,195.779 D3.1@131.069,196.332
NetD4_1: D4.1 D5.3 | length 18.5
  Top Layer w0.254: v1(124.926,196.079) D5.3@125.723,196.079 ; D4.1@131.218,194.033 131.012,193.827 v1(131.807,193.782)
  Bottom Layer w0.254: v1(123.896,189.93) 124.977,189.483 125.692,189.779 126.721,189.353 128.26,185.637 129.375,185.175 ; v1(124.926,196.079) 126.096,196.079 126.643,196.626 127.757,196.626 130.6,193.782 v1(131.807,193.782)
NetD5_1: D5.1 D6.3 | length 16.6
  Top Layer w0.254: v1(120.608,196.18) 120.587,196.13 120.608,196.079 D6.3@121.405,196.079 ; D5.1@126.723,195.079 v1(127.52,195.079)
  Bottom Layer w0.254: v1(119.946,191.676) 119.907,191.638 119.907,191.583 120.988,191.135 121.284,190.421 123.431,189.531 125.612,188.628 125.857,188.036 v1(125.91,188.014) ; v1(120.608,196.18) 120.587,196.13 120.608,196.079 121.778,196.079 122.325,195.532 124.649,195.532 127.01,195.532 127.463,195.079 v1(127.52,195.079)
NetD6_1: D6.1 D7.3 | length 16.3
  Top Layer w0.254: v1(116.291,196.13) 116.33,196.13 116.381,196.079 D7.3@117.087,196.079 ; D6.1@122.405,195.079 122.452,195.032 123.155,195.032 v1(123.202,194.985)
  Bottom Layer w0.254: v1(116.291,196.13) 116.319,196.157 116.752,196.157 116.786,196.192 116.99,196.192 117.087,196.172 118.389,195.633 118.864,195.633 120.734,195.633 121.382,194.985 v1(123.202,194.985) ; v1(116.654,193.893) 116.654,193.052 117.686,192.02 118.125,191.838 119.852,191.123 120.203,190.276 v1(121.884,189.58)
NetD7_1: D7.1 D14.3 | length 28.1
  Top Layer w0.254: D14.3@116.659,192.929 v1(116.659,193.892) ; D7.1@118.134,195.055 v1@118.837,195.055
  Layer 2 w0.2: 116.107,193.024 116.336,192.47 119.137,191.31 121.284,190.421 123.431,189.531 125.612,188.628 126.3,188.343 126.988,188.058 129.846,186.874 132.384,187.925
  Layer 2 w0.254: 116.107,194.119 117.012,195.025 ; 116.107,194.119 117.012,195.025 ; 116.107,194.119 116.107,193.024 116.107,194.119 ; 117.012,195.025 v1(118.881,195.025) 117.012,195.025
  other v1: 117.907,191.27
NetD8_1: D8.1 D15.3 | length 0.8
  Top Layer w0.254: v1(127.671,179.543) D15.3@128.265,179.012
NetD8_3: D8.3 D9.1 | length 0.8
  Top Layer w0.254: v1(132.383,187.926) D8.3@133.136,187.663
NetD9_3: D9.3 D10.1
NetD10_3: D10.3 D11.1
NetD11_3: D11.3 D12.1
NetD12_3: D12.3 D13.1
NetD13_3: D13.3 D14.1 | length 23.3
  Top Layer w0.254: D14.1@117.204,191.621 D14.1@117.395,191.621 ; D14.1@117.235,191.582 v1@117.884,191.313 ; v1@117.847,191.335 v1(117.913,191.269)
  Layer 2 w0.2: 114.579,190.483 114.579,189.883 116.722,187.74 118.366,186.097 120.009,184.453 121.678,182.784 122.205,182.258 122.731,181.731 124.919,179.544 127.666,179.544
  Layer 2 w0.254: 114.579,190.483 114.998,191.495 116.181,191.985 v1@117.907,191.27
  Bottom Layer w0.254: v1@117.864,191.386 v1(117.913,191.269)
NetD15_1: D15.1 D16.3 | length 2.5
  Top Layer w0.254: D16.3@126.268,176.935 126.676,177.299 127.265,177.266 127.423,177.088 127.913,177.116 D15.1@128.346,177.601
NetD16_1: D16.1 D17.3 | length 10
  Top Layer w0.254: v1(124.449,182.418) D17.3@125.044,181.888 ; D16.1@126.188,175.523 v1(126.719,174.929)
  Bottom Layer w0.254: v1(124.449,182.418) 125.685,181.182 125.685,175.962 v1(126.719,174.929)
NetD17_1: D17.1 D18.3 | length 2.2
  Top Layer w0.254: D18.3@123.393,180.157 123.761,180.486 124.024,180.471 124.224,180.246 124.449,180.045 124.755,180.063 D17.1@125.124,180.476
NetD18_1: D18.1 D19.3 | length 10.2
  Top Layer w0.254: v1(120.602,184.64) D19.3@121.165,184.077 ; D18.1@123.604,178.745 123.313,178.745 v1(123.843,178.15)
  Bottom Layer w0.254: v1(120.602,184.64) 121.429,183.813 122.203,183.813 122.99,183.026 122.99,179.004 v1(123.843,178.15)
NetD19_1: D19.1 D20.3 | length 9.1
  Top Layer w0.254: v1(117.62,187.765) 117.57,187.744 117.549,187.693 D20.3@118.112,187.13 ; D19.1@121.165,182.662 v1(121.729,182.099)
  Bottom Layer w0.254: v1(117.62,187.765) 117.57,187.744 117.549,187.693 118.376,186.866 118.376,186.093 120.019,184.449 121.688,182.78 121.688,182.139 v1(121.729,182.099)
NetD20_1: D20.1 D21.3 | length 9.2
  Top Layer w0.254: D21.3@115.059,190.183 v1(115.427,191.072) ; D20.1@118.112,185.716 118.112,185.649 118.609,185.152 v1(118.609,185.086)
  Bottom Layer w0.254: v1(115.427,191.072) 115.105,190.296 115.664,188.948 116,188.611 117.322,187.29 117.322,186.373 v1(118.609,185.086)
NetD21_1: D21.1 D28.3 | length 1.1
  Top Layer w0.254: D21.1@115.061,188.766 D21.1@115.238,188.693 ; D21.1@115.075,188.719 v1@115.571,188.222 ; v1@115.545,188.256 v1(115.581,188.17)
  Bottom Layer w0.254: v1(115.581,188.17) v1@115.581,188.296
NetD22_1: D22.1 D42.3
NetD22_3: D22.3 D23.1 | length 23
  Top Layer w0.254: v1(120.109,173.602) D22.3@120.456,172.884
  Layer 2 w0.2: 112.195,188.721 111.966,188.166 113.126,185.366 114.015,183.219 114.904,181.072 115.808,178.891 116.093,178.203 116.378,177.515 117.561,174.657 v1@120.099,173.606
  Layer 2 w0.254: 112.195,188.721 112.97,189.495 114.25,189.495 115.571,188.174
NetD23_3: D23.3 D24.1
NetD24_3: D24.3 D25.1
NetD25_3: D25.3 D26.1
NetD26_3: D26.3 D27.1
NetD27_3: D27.3 D28.1 | length 1.1
  Top Layer w0.254: D28.1@111.983,186.899 v1@112.252,186.25 ; D28.1@111.989,186.949 D28.1@112.125,186.813 ; v1(112.241,186.198) v1@112.241,186.292
  Bottom Layer w0.254: v1(112.241,186.198) v1@112.29,186.315
NetD29_1: D29.1 D49.3
NetD29_3: D29.3 D35.1
NetD30_1: D30.1 D35.3
NetD30_3: D30.3 D31.1
NetD31_3: D31.3 D32.1
NetD32_3: D32.3 D33.1
NetD33_3: D33.3 D41.1
NetD34_1: D34.1 D43.3
NetD34_3: D34.3 D44.1
NetD36_1: D36.1 D47.3
NetD36_3: D36.3 D37.1 | length 23
  Top Layer w0.254: D36.3@101.039,171.4 v1(101.302,172.153)
  Layer 2 w0.2: v1@101.288,172.166 100.236,174.705 101.42,177.562 101.705,178.25 101.99,178.938 102.893,181.119 103.783,183.266 104.672,185.413 105.832,188.214 106.386,188.443
  Layer 2 w0.254: 106.386,188.443 107.481,188.443 108.387,187.538 108.387,185.669
NetD37_3: D37.3 D38.1
NetD38_3: D38.3 D39.1
NetD39_3: D39.3 D40.1
NetD40_3: D40.3 D48.1
NetD41_3: D41.3 D42.1
NetD43_1: D43.1 D56.3
NetD44_3: D44.3 D45.1
NetD45_3: D45.3 D46.1
NetD46_3: D46.3 D47.1 | length 9.1
  Top Layer w0.254: v1(95.476,182.807) D47.1@96.039,183.371 ; 100.506,186.424 101.07,186.987 101.12,186.966 v1(101.141,186.916)
  Bottom Layer w0.254: v1(95.476,182.807) 95.516,182.848 96.157,182.848 97.826,184.517 99.469,186.16 100.243,186.16 101.07,186.987 101.12,186.966 v1(101.141,186.916)
NetD48_3: D48.3 D49.1
NetD50_1: D50.1 D63.3
NetD50_3: D50.3 D51.1 | length 23
  Top Layer w0.254: D50.3@86.261,184.08 v1(86.978,184.427)
  Layer 2 w0.2: v1@86.968,184.451 88.019,186.989 90.877,188.172 91.565,188.457 92.253,188.742 94.434,189.646 96.581,190.535 98.728,191.424 101.529,192.584 102.083,192.355
  Layer 2 w0.254: 101.536,188.979 102.857,190.3 102.857,191.58 102.083,192.355
NetD51_3: D51.3 D52.1
NetD52_3: D52.3 D53.1
NetD53_3: D53.3 D54.1
NetD54_3: D54.3 D55.1
NetD55_3: D55.3 D56.1 | length 1.1
  Top Layer w0.254: v1(99.575,192.295) v1@99.668,192.295 ; v1@99.627,192.284 D56.1@100.276,192.553 ; D56.1@100.19,192.411 D56.1@100.325,192.547
  Bottom Layer w0.254: v1(99.575,192.295) v1@99.692,192.246
NetD57_1: D57.1 D70.3
NetD57_3: D57.3 D58.1 | length 23
  Top Layer w0.254: D57.3@83.588,193.641 v1(84.383,193.686)
  Layer 2 w0.2: v1@84.377,193.713 86.32,195.656 89.413,195.656 90.158,195.656 90.903,195.656 93.263,195.656 95.587,195.656 97.911,195.656 100.942,195.656 101.366,195.232
  Layer 2 w0.254: 99.569,192.322 101.296,193.037 101.786,194.22 101.366,195.232
NetD58_3: D58.3 D59.1
NetD59_3: D59.3 D60.1
NetD60_3: D60.3 D61.1
NetD61_3: D61.3 D62.1
NetD62_3: D62.3 D63.1 | length 1.1
  Top Layer w0.254: v1(99.032,196.135) v1@99.118,196.099 ; v1@99.076,196.105 D63.1@99.778,196.105 ; D63.1@99.645,196.007 D63.1@99.821,196.081
  Bottom Layer w0.254: v1(99.032,196.135) v1@99.121,196.045
NetD64_1: D64.1 D77.3
NetD64_3: D64.3 D65.1 | length 23
  Top Layer w0.254: D64.3@84.777,203.497 v1(85.529,203.234)
  Layer 2 w0.2: v1@85.529,203.262 88.067,204.314 90.924,203.13 91.613,202.845 92.301,202.56 94.481,201.657 96.629,200.767 98.776,199.878 101.576,198.718 101.806,198.164
  Layer 2 w0.254: 99.032,196.163 100.9,196.163 101.806,197.069 101.806,198.164
NetD65_3: D65.3 D66.1
NetD66_3: D66.3 D67.1
NetD67_3: D67.3 D68.1
NetD68_3: D68.3 D69.1
NetD69_3: D69.3 D70.1 | length 1.1
  Top Layer w0.254: v1(100,199.891) v1@100.066,199.824 ; v1@100.029,199.846 D70.1@100.678,199.577 ; D70.1@100.517,199.538 D70.1@100.708,199.538
  Bottom Layer w0.254: v1(100,199.891) v1@100.048,199.774
NetD71_1: D71.1 D84.3
NetD71_3: D71.3 D72.1 | length 23
  Top Layer w0.254: D71.3@89.647,212.147 v1(90.241,211.617)
  Layer 2 w0.2: v1@90.247,211.644 92.994,211.644 95.181,209.457 95.708,208.93 96.234,208.404 97.903,206.734 99.547,205.091 101.19,203.448 103.333,201.304 103.333,200.705
  Layer 2 w0.254: 100.005,199.918 101.731,199.203 102.914,199.693 103.333,200.705
NetD72_3: D72.3 D73.1
NetD73_3: D73.3 D74.1
NetD74_3: D74.3 D75.1
NetD75_3: D75.3 D76.1
NetD76_3: D76.3 D77.1 | length 23.3
  Top Layer w0.254: v1(102.331,202.99) v1@102.367,202.903 ; v1@102.341,202.938 D77.1@102.838,202.441 ; D77.1@102.674,202.466 D77.1@102.851,202.393
  Layer 2 w0.2: 97.813,217.582 100.351,216.531 101.535,213.673 101.82,212.985 102.105,212.297 103.008,210.116 103.897,207.969 104.787,205.822 105.947,203.022 105.717,202.467
  Layer 2 w0.254: v1@102.341,203.014 103.662,201.693 104.943,201.693 105.717,202.467
  Bottom Layer w0.254: v1@102.331,202.863 v1(102.331,202.99)
NetD78_1: D78.1 D91.3
NetD78_3: D78.3 D79.1 | length 0.8
  Top Layer w0.254: D78.3@97.457,218.275 v1(97.803,217.558)
NetD79_3: D79.3 D80.1
NetD80_3: D80.3 D81.1
NetD81_3: D81.3 D82.1
NetD82_3: D82.3 D83.1
NetD83_3: D83.3 D84.1 | length 23.3
  Top Layer w0.254: v1@105.66,204.909 D84.1@105.929,204.26 ; v1@105.671,204.868 v1(105.671,204.961) ; D84.1@105.788,204.346 D84.1@105.923,204.211
  Layer 2 w0.2: 107.076,220.173 109.018,218.23 109.018,215.137 109.018,214.392 109.018,213.647 109.018,211.287 109.018,208.963 109.018,206.639 109.018,203.608 108.594,203.184
  Layer 2 w0.254: v1@105.684,204.981 106.399,203.255 107.582,202.765 108.594,203.184
  Bottom Layer w0.254: v1@105.623,204.844 v1(105.671,204.961)
NetD85_1: D85.1 D98.3
NetD85_3: D85.3 D86.1 | length 0.8
  Top Layer w0.254: D85.3@107.017,220.948 v1(107.063,220.153)
NetD86_3: D86.3 D87.1
NetD87_3: D87.3 D88.1
NetD88_3: D88.3 D89.1
NetD89_3: D89.3 D90.1
NetD90_3: D90.3 D91.1 | length 23.3
  Top Layer w0.254: D91.1@109.384,204.891 D91.1@109.457,204.714 ; v1@109.476,205.418 v1(109.511,205.504) ; D91.1@109.481,204.758 v1@109.481,205.46
  Layer 2 w0.2: 111.526,202.745 112.08,202.974 113.24,205.775 114.13,207.922 115.019,210.069 115.922,212.25 116.207,212.938 116.492,213.626 117.676,216.483 116.625,219.021
  Layer 2 w0.254: v1@109.526,205.518 109.526,203.65 110.431,202.745 111.526,202.745
  Bottom Layer w0.254: v1@109.422,205.415 v1(109.511,205.504)
NetD92_1: D92.1 D105.3
NetD92_3: D92.3 D93.1 | length 0.8
  Top Layer w0.254: v1(116.61,219.007) D92.3@116.873,219.759
NetD93_3: D93.3 D94.1
NetD94_3: D94.3 D95.1
NetD95_3: D95.3 D96.1
NetD96_3: D96.3 D97.1
NetD97_3: D97.3 D98.1 | length 23.3
  Top Layer w0.254: D98.1@112.915,203.827 D98.1@112.915,204.019 ; D98.1@112.954,203.858 v1@113.223,204.507 ; v1@113.201,204.47 v1(113.267,204.536)
  Layer 2 w0.2: 114.067,201.217 114.667,201.217 116.81,203.36 118.453,205.003 120.097,206.647 121.766,208.316 122.292,208.843 122.819,209.369 125.006,211.556 125.006,214.303
  Layer 2 w0.254: v1@113.28,204.545 112.565,202.819 113.055,201.636 114.067,201.217
  Bottom Layer w0.254: v1@113.15,204.488 v1(113.267,204.536)
NetD99_1: D99.1 D112.3
NetD99_3: D99.3 D100.1 | length 0.8
  Top Layer w0.254: v1(124.993,214.295) D99.3@125.523,214.889
NetD100_3: D100.3 D101.1
NetD101_3: D101.3 D102.1
NetD102_3: D102.3 D103.1
NetD103_3: D103.3 D104.1
NetD104_3: D104.3 D105.1 | length 23.3
  Top Layer w0.254: D105.1@115.77,201.685 D105.1@115.843,201.862 ; D105.1@115.817,201.698 v1@116.314,202.195 ; v1@116.28,202.169 v1(116.366,202.205)
  Layer 2 w0.2: 115.83,198.833 116.384,198.603 119.184,199.763 121.331,200.653 123.478,201.542 125.659,202.445 126.347,202.73 127.035,203.015 129.893,204.199 130.944,206.737
  Layer 2 w0.254: 115.83,198.833 115.055,199.607 115.055,200.888 v1@116.376,202.209
  Bottom Layer w0.254: v1@116.24,202.205 v1(116.366,202.205)
NetD106_1: D106.1 D120.3
NetD106_3: D106.3 D107.1 | length 0.8
  Top Layer w0.254: v1(130.934,206.733) D106.3@131.652,207.079
NetD107_3: D107.3 D108.1
NetD108_3: D108.3 D109.1
NetD109_3: D109.3 D110.1
NetD110_3: D110.3 D111.1
NetD111_3: D111.3 D112.1 D122.3 | length 6.3
  Top Layer w0.254: D122.3@113.774,195.094 114.493,195.094 117.344,197.946 117.344,198.179 117.584,198.418 D112.1@117.584,198.612
  Layer 2 w0.2: 127.755,195.532 128.499,195.532
NetD114_1: D114.1 D115.3 | length 2.7
  Top Layer w0.2: D115.3@109.456,200.412 cw(c109.456,200.215) 109.595,200.354 109.679,200.189 109.679,200.255 cw(c109.575,200.053) 109.735,200.215 109.961,199.989 cw(c109.781,199.81) 110.032,199.847 ccw(c110.261,199.88) 110.04,199.812 110.044,199.799 ccw(c110.266,199.866) 110.074,199.735 110.08,199.727 ccw(c110.274,199.853) 110.129,199.673 110.136,199.667 ccw(c110.297,199.863) 110.138,199.665 ccw(c110.286,199.844) 110.199,199.629 ; 110.2,199.628 cw(c110.105,199.393) 110.205,199.626 110.361,199.562 cw(c110.263,199.327) 110.442,199.507 D114.1@111.302,198.647
NetD114_3: D114.3 D120.1 D122.1 | length 4
  Top Layer w0.2: 112.69,197.563 ccw(c112.455,197.468) 112.688,197.567 cw(c112.901,197.659) 112.67,197.637 cw(c112.923,197.665) 112.67,197.639 112.669,197.649 cw(c112.9,197.674) 112.673,197.722 112.675,197.731 cw(c112.903,197.689) 112.698,197.798 112.705,197.811 cw(c112.91,197.702) 112.724,197.841 ccw(c112.52,197.992) 112.774,197.991 112.774,198.311 ccw(c112.547,198.31) 112.763,198.379 112.717,198.332 112.774,198.508 ccw(c112.578,198.508) D114.3@112.717,198.647 ; 112.69,197.562 112.755,197.406 cw(c112.52,197.309) 112.774,197.31 D122.1@112.774,196.094
  Top Layer w0.254: D120.1@112.01,193.248 112.01,194.507
NetD115_1: D115.1 D116.3 | length 2.7
  Top Layer w0.2: D116.3@105.903,199.354 cw(c106.042,199.215) 106.042,199.412 106.218,199.354 106.171,199.401 cw(c106.241,199.185) 106.239,199.412 106.559,199.412 cw(c106.558,199.158) 106.709,199.362 ccw(c106.848,199.548) 106.739,199.343 106.752,199.336 ccw(c106.861,199.541) 106.819,199.313 106.829,199.311 ccw(c106.876,199.538) 106.901,199.307 106.911,199.308 ccw(c106.886,199.561) 106.913,199.308 ccw(c106.891,199.539) 106.982,199.326 cw(c107.082,199.092) 106.988,199.328 107.144,199.393 cw(c107.241,199.158) 107.24,199.412 D115.1@108.456,199.412
NetD116_1: D116.1 D117.3 | length 2.7
  Top Layer w0.2: D117.3@104.138,196.094 cw(c104.335,196.094) 104.196,196.233 104.361,196.317 104.295,196.317 cw(c104.497,196.213) 104.335,196.372 104.562,196.599 cw(c104.74,196.418) 104.703,196.67 ccw(c104.67,196.899) 104.738,196.677 104.751,196.681 ccw(c104.684,196.903) 104.815,196.712 104.824,196.718 ccw(c104.697,196.912) 104.878,196.766 104.884,196.774 ccw(c104.687,196.935) 104.885,196.776 ccw(c104.706,196.923) 104.922,196.837 ; 104.922,196.838 cw(c105.157,196.742) 104.924,196.842 104.989,196.999 cw(c105.223,196.901) 105.043,197.08 D116.1@105.903,197.94
NetD117_1: D117.1 D118.3 | length 2.7
  Top Layer w0.2: D117.1@105.138,195.094 105.138,193.878 ccw(c105.392,193.878) 105.157,193.782 105.222,193.625 ccw(c105.458,193.72) 105.224,193.621 cw(c105.011,193.529) 105.242,193.551 cw(c104.989,193.523) 105.242,193.548 105.243,193.539 cw(c105.012,193.514) 105.24,193.466 105.238,193.456 cw(c105.01,193.499) 105.214,193.389 105.207,193.377 cw(c105.002,193.486) 105.188,193.347 ccw(c105.392,193.196) 105.138,193.197 105.138,192.877 ccw(c105.365,192.878) 105.149,192.809 105.196,192.856 105.138,192.68 ccw(c105.335,192.68) D118.3@105.196,192.541
NetD118_1: D118.1 | length 2.7
  Top Layer w0.2: D118.1@106.61,192.541 107.47,191.681 ccw(c107.649,191.861) 107.551,191.626 107.708,191.562 ccw(c107.808,191.795) 107.713,191.56 cw(c107.627,191.344) 107.775,191.523 cw(c107.615,191.325) 107.776,191.521 107.784,191.515 cw(c107.638,191.334) 107.833,191.461 107.838,191.453 cw(c107.647,191.322) 107.869,191.389 107.873,191.376 cw(c107.651,191.308) 107.881,191.341 ccw(c108.132,191.378) 107.951,191.199 108.178,190.973 ccw(c108.337,191.134) 108.233,190.933 108.233,190.999 108.317,190.834 ccw(c108.456,190.973) 108.456,190.776
NetD119_1: D119.1 D121.3 | length 3.2
  Top Layer w0.254: D121.3@109.456,195.094 109.81,195.447 111.281,195.447 111.958,194.771 111.958,194.507
NetD119_1: D119.3 | length 2.7
  Top Layer w0.2: 109.456,191.776 110.672,191.776 ccw(c110.672,192.03) 110.768,191.795 110.925,191.86 ccw(c110.83,192.096) 110.93,191.862 cw(c111.021,191.649) 110.999,191.88 cw(c111.027,191.627) 111.002,191.88 111.011,191.881 cw(c111.036,191.65) 111.084,191.877 111.094,191.875 cw(c111.051,191.647) 111.161,191.852 111.173,191.845 cw(c111.064,191.64) 111.203,191.826 ccw(c111.354,192.03) 111.353,191.776 111.673,191.776 ccw(c111.672,192.003) 111.741,191.787 111.694,191.834 111.87,191.776 ccw(c111.87,191.973) 112.01,191.834
NetD121_1: D121.1